# Altium PCB main_board.PcbDoc
Units mil, origin at the board's own origin, x right, y up, seen from the top; angles counter-clockwise.
Board outline 4625.98 x 5708.66 mil, 8 copper layers (layer 01, GND, layer 02, esp32-1, esp32, layer 03, GND-1, layer 04), stack 40.468 mil thick; 45 components, 47 nets, 193 pads, 101 vias.
Unrouted connection lines stored in the file: 1.
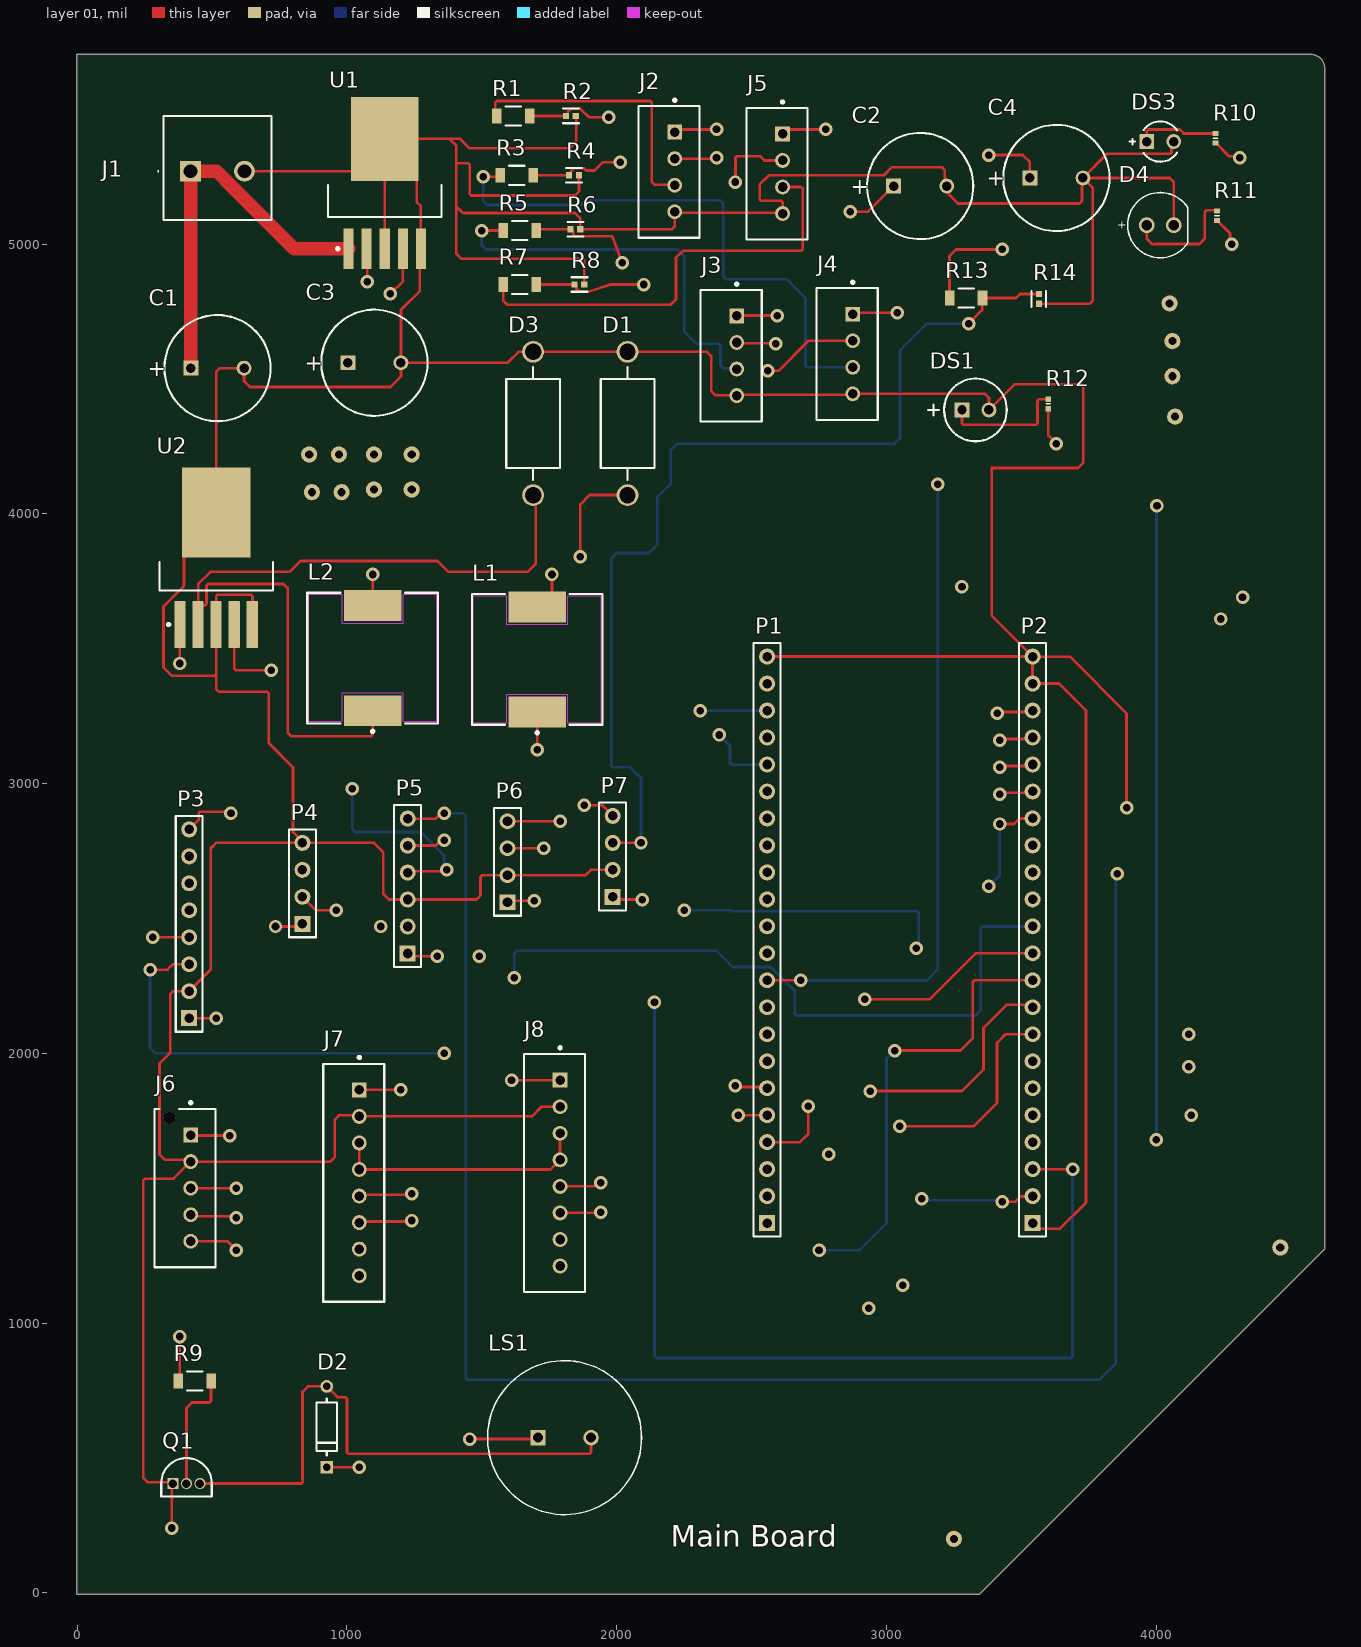
[diagram p0: layer 01 view]
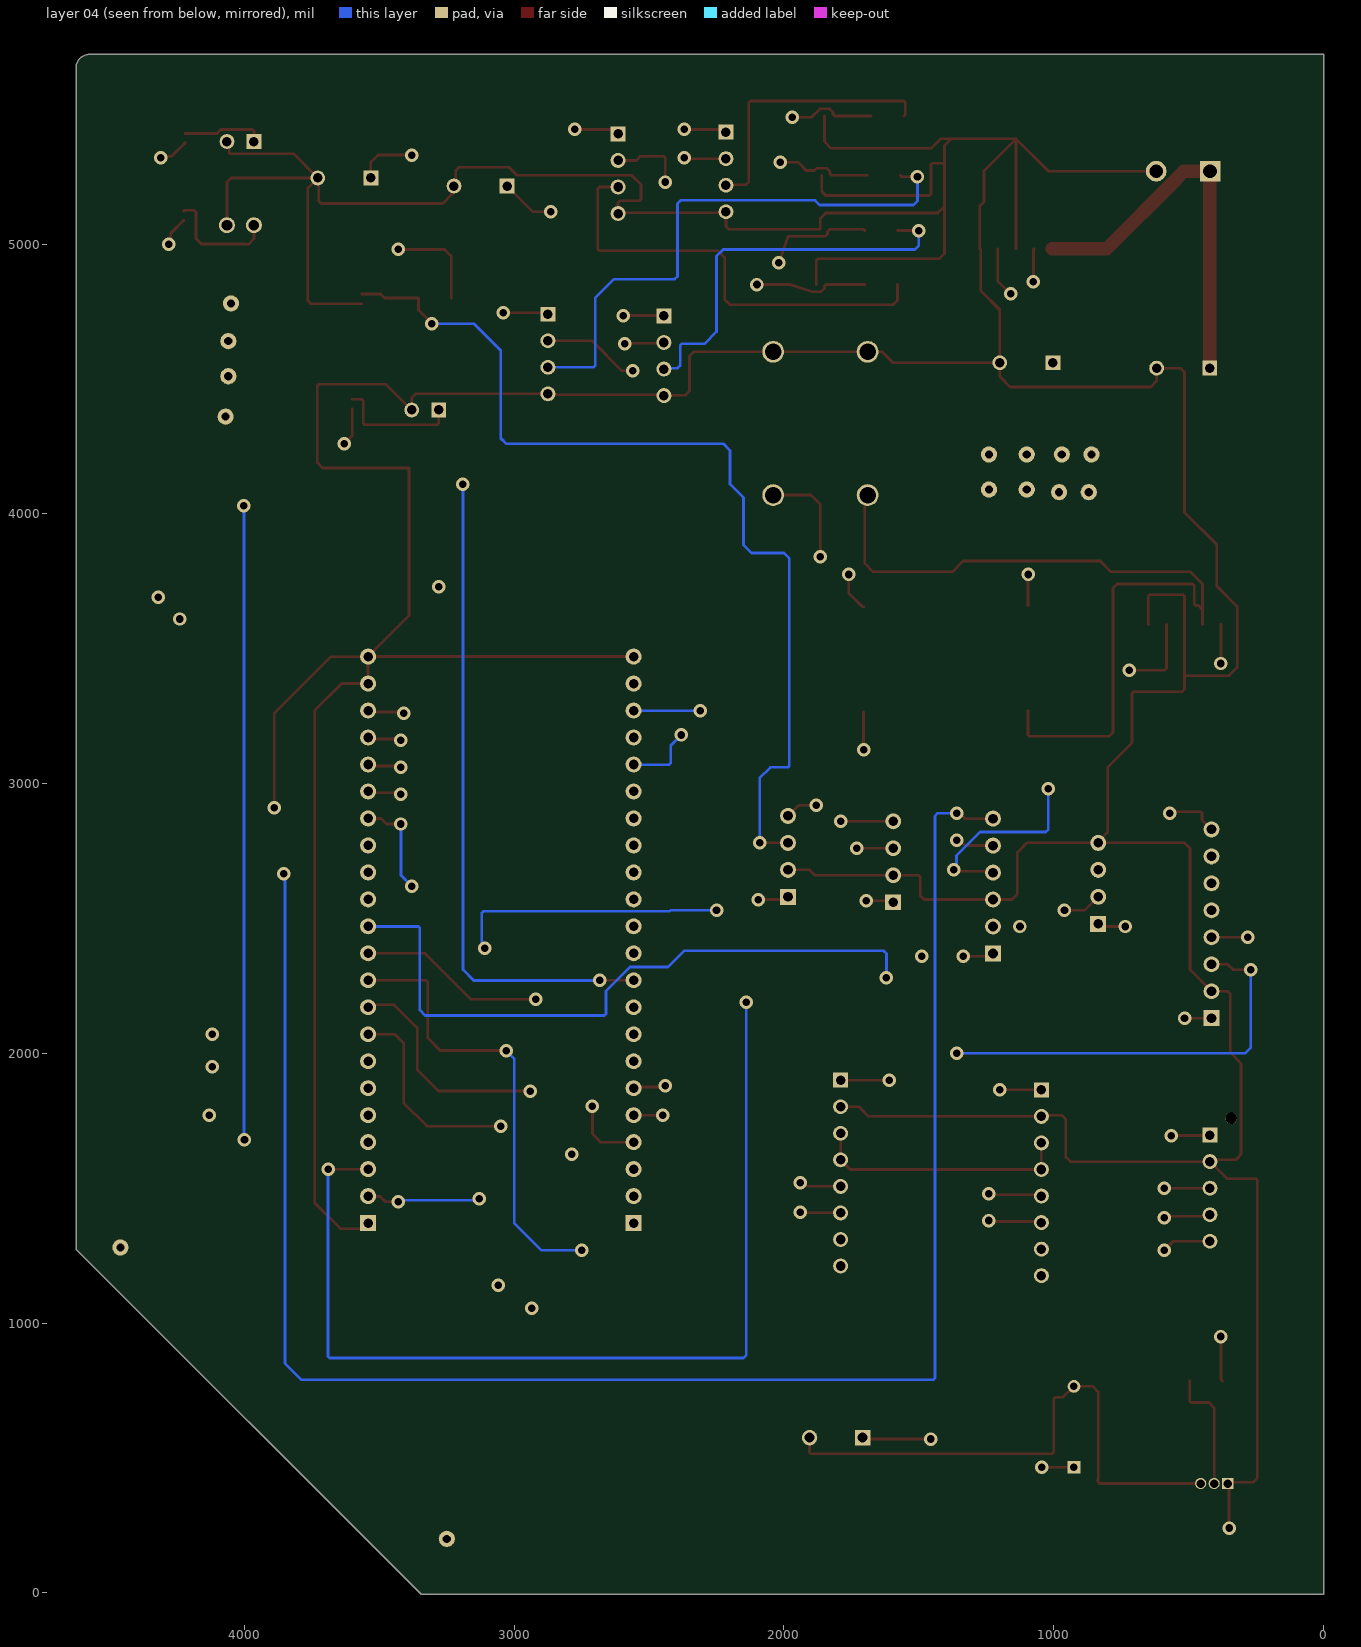
[diagram p1: layer 04 view, seen from below]
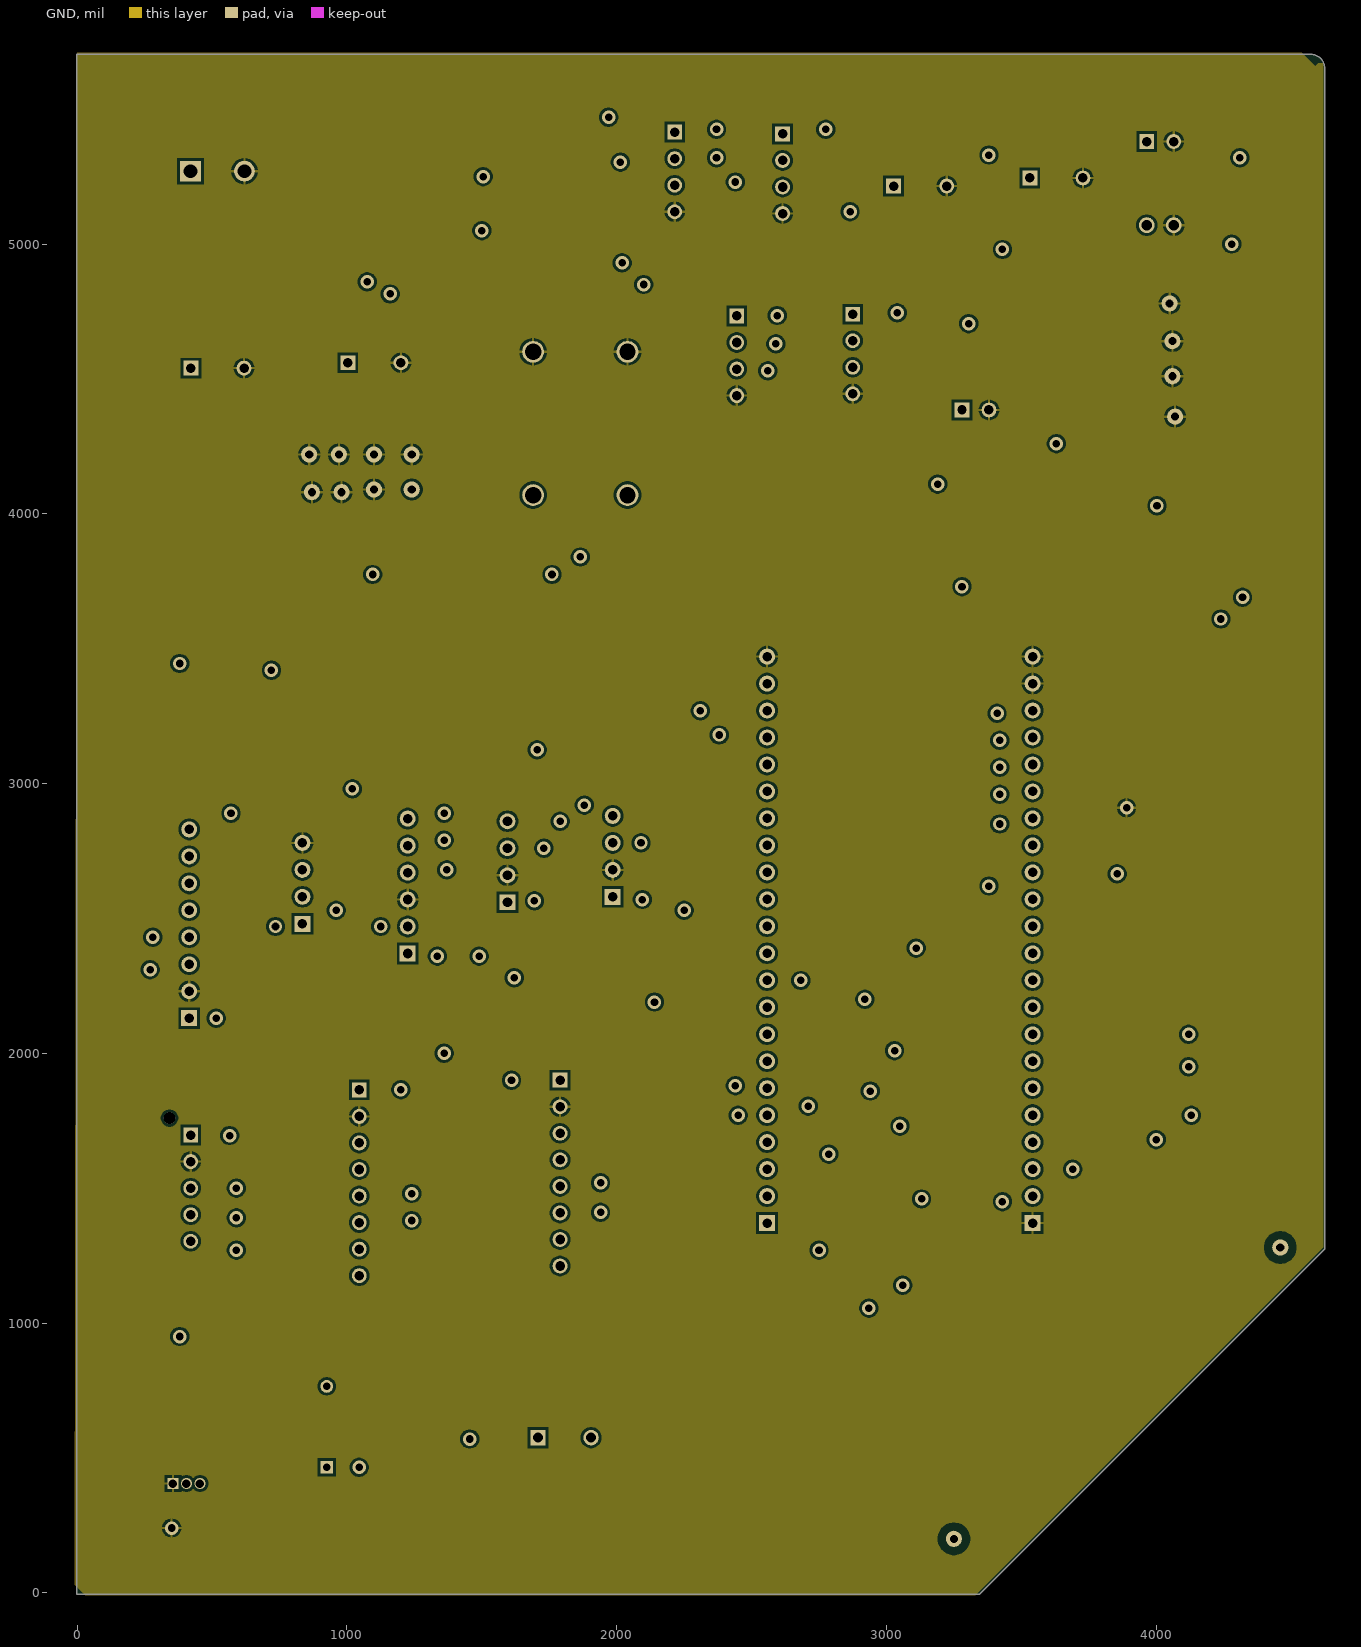
[diagram p2: GND]
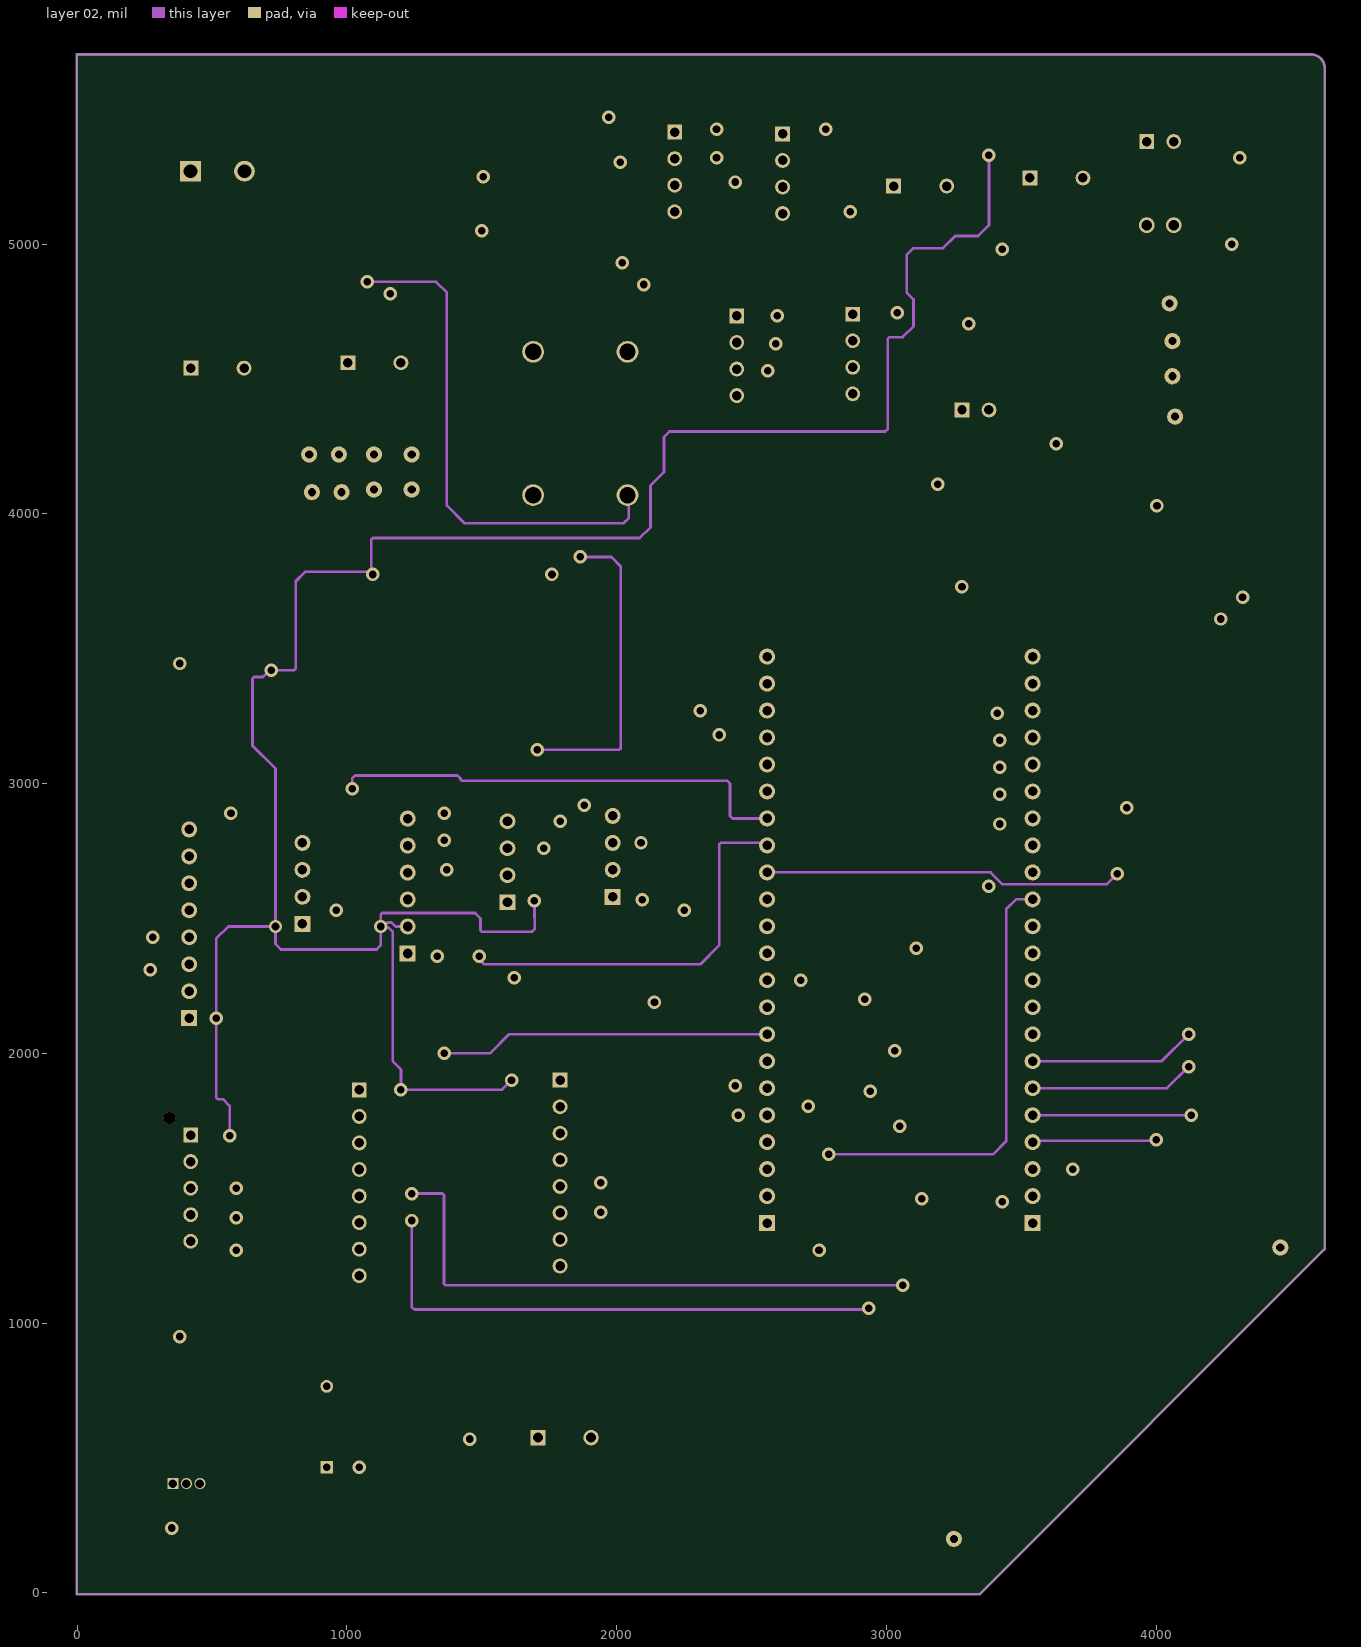
[diagram p3: layer 02]
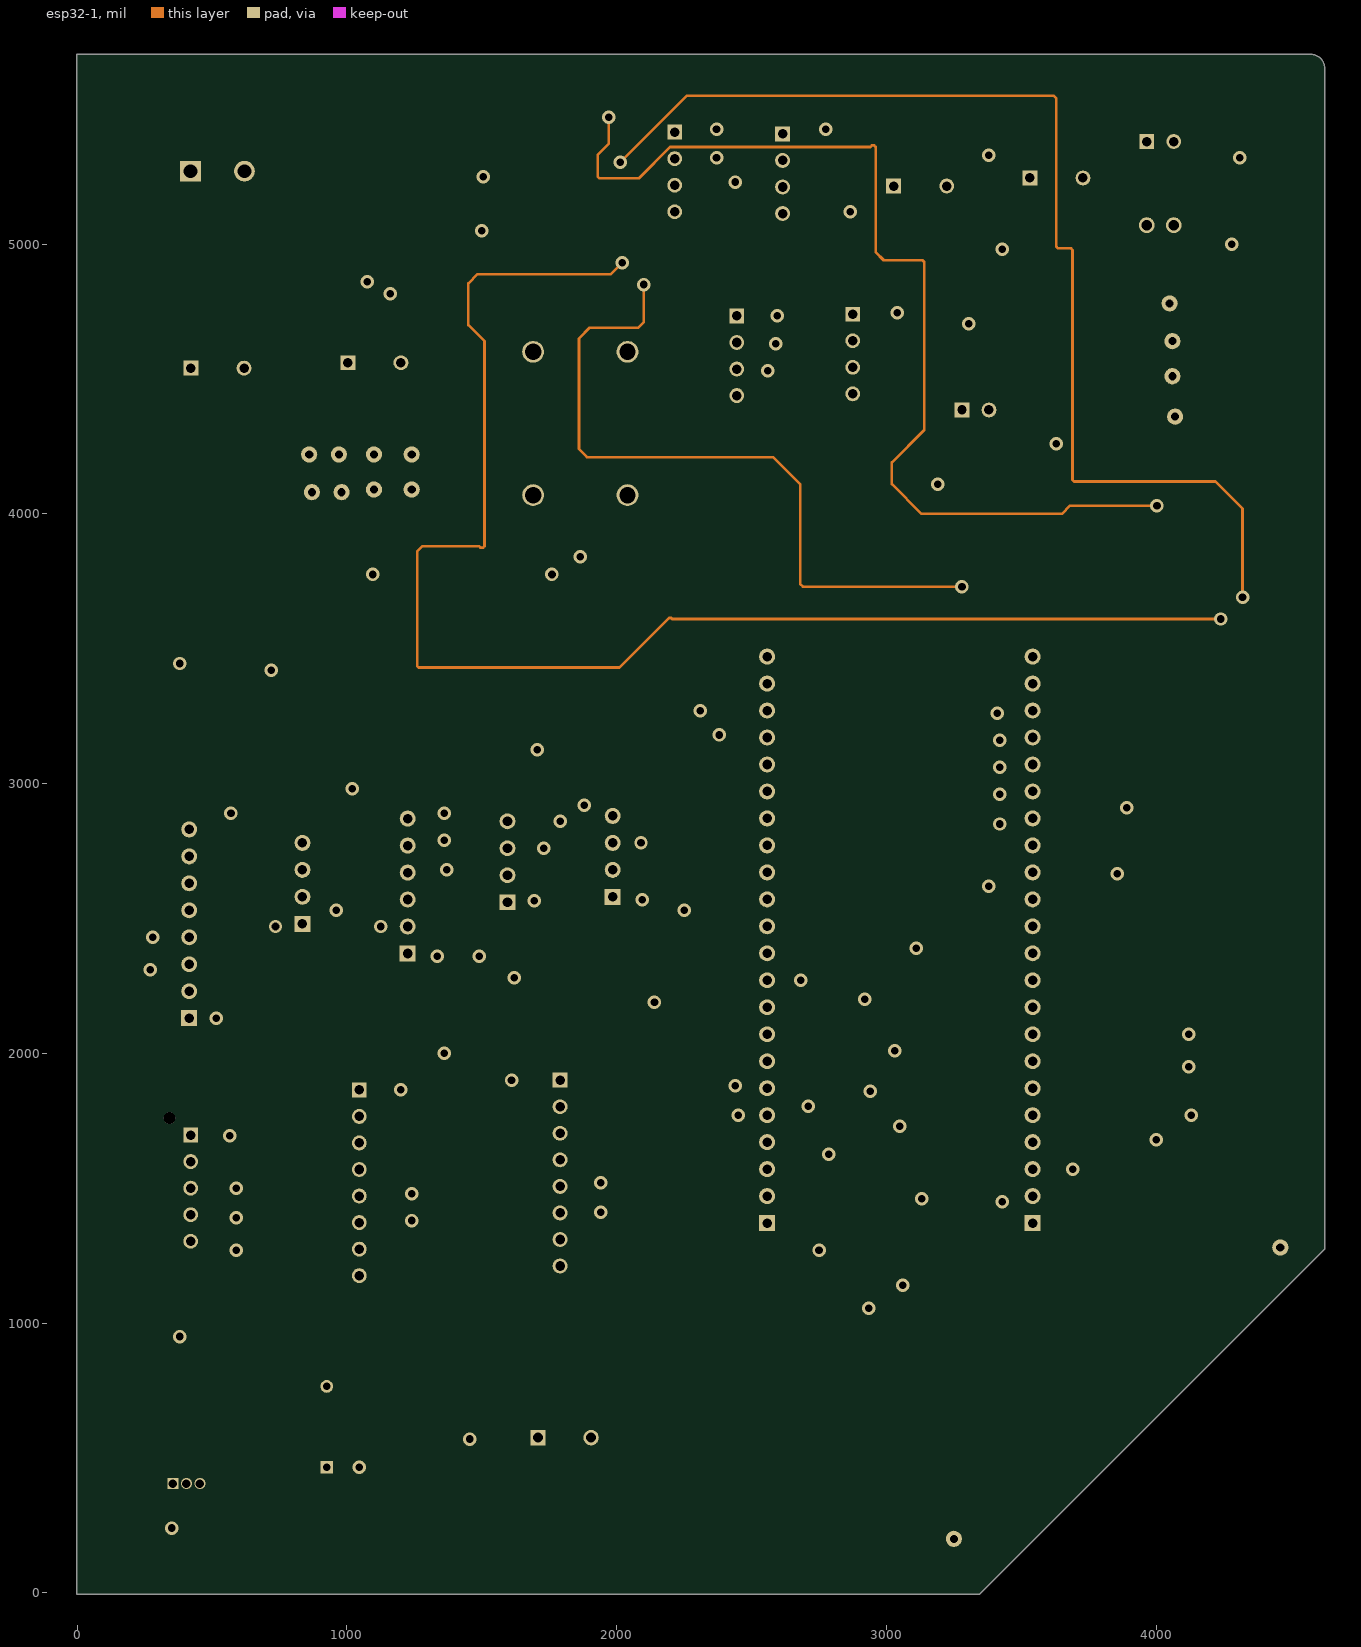
[diagram p4: esp32-1]
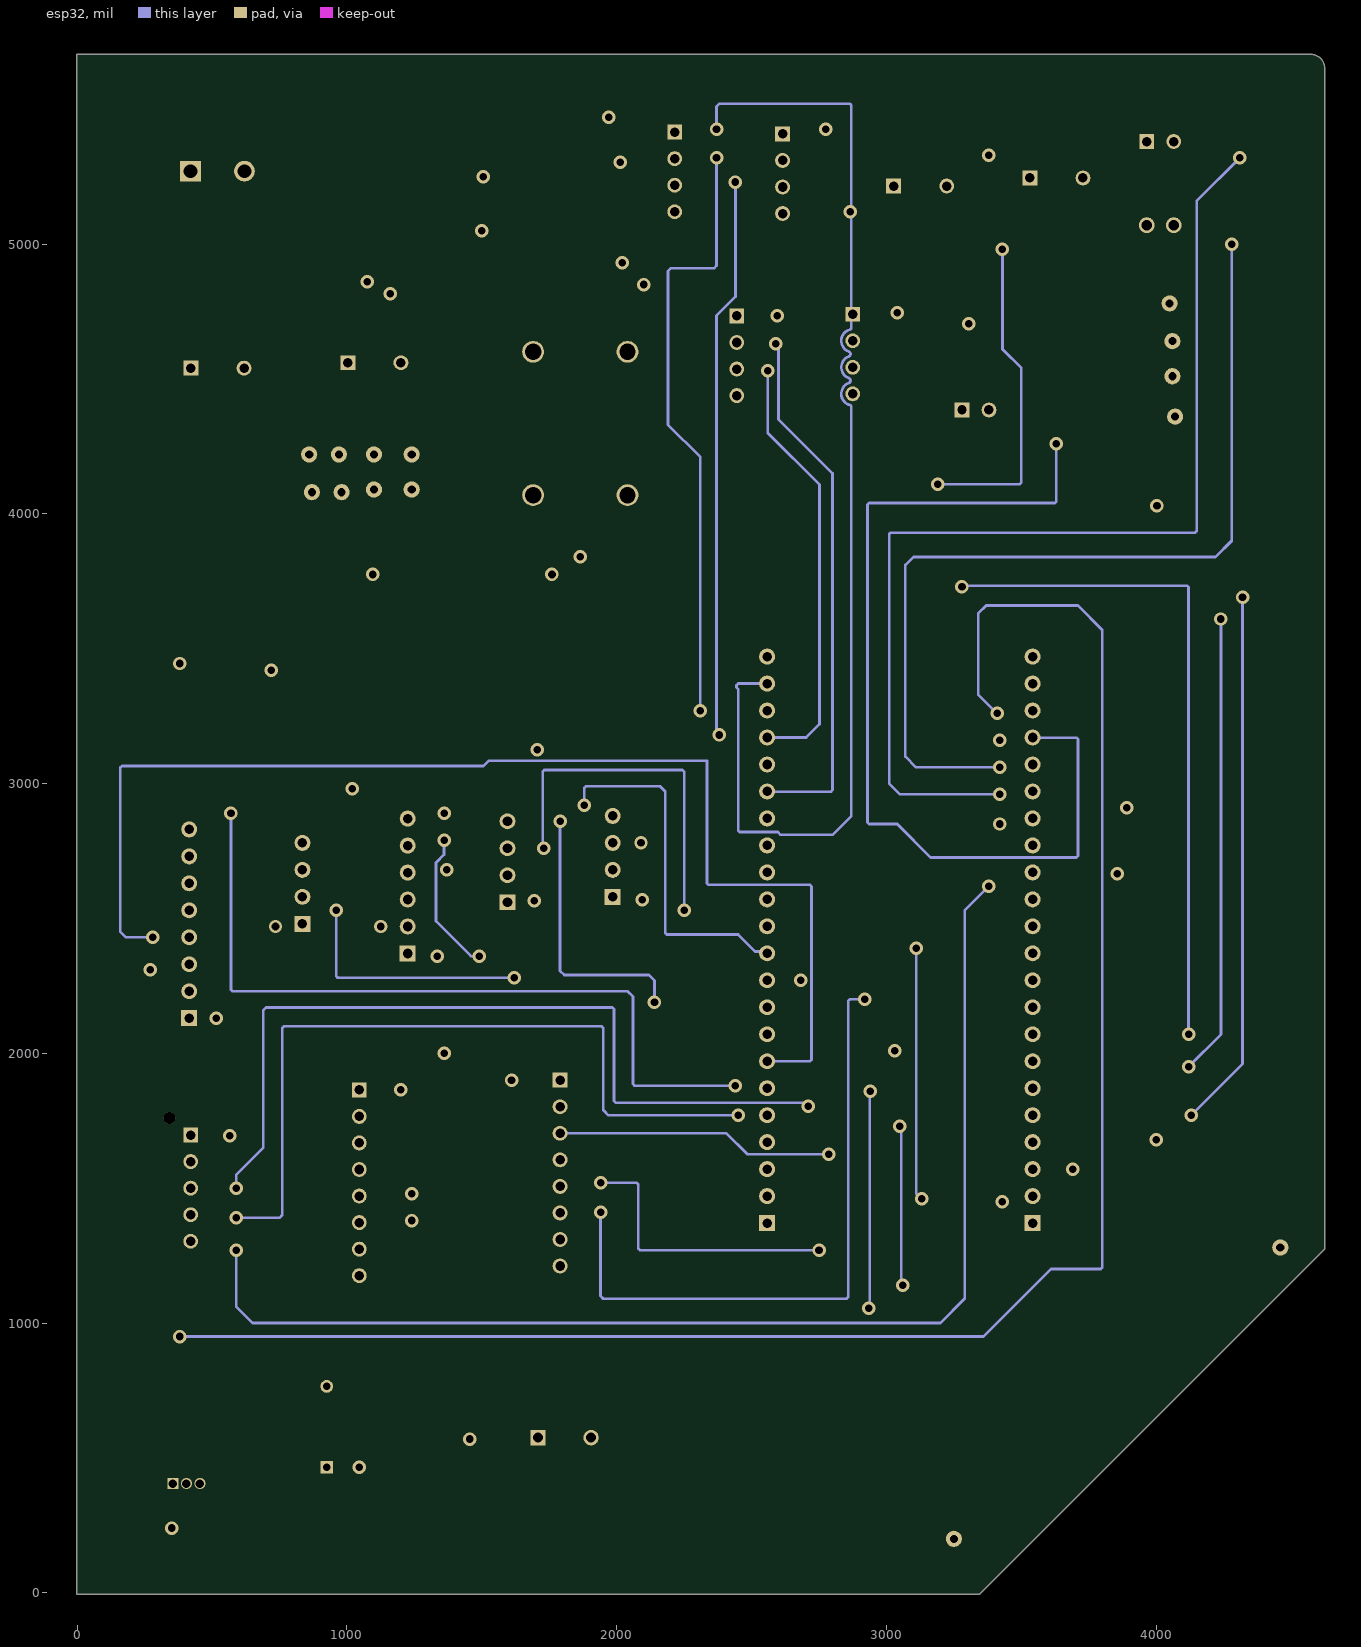
[diagram p5: esp32]
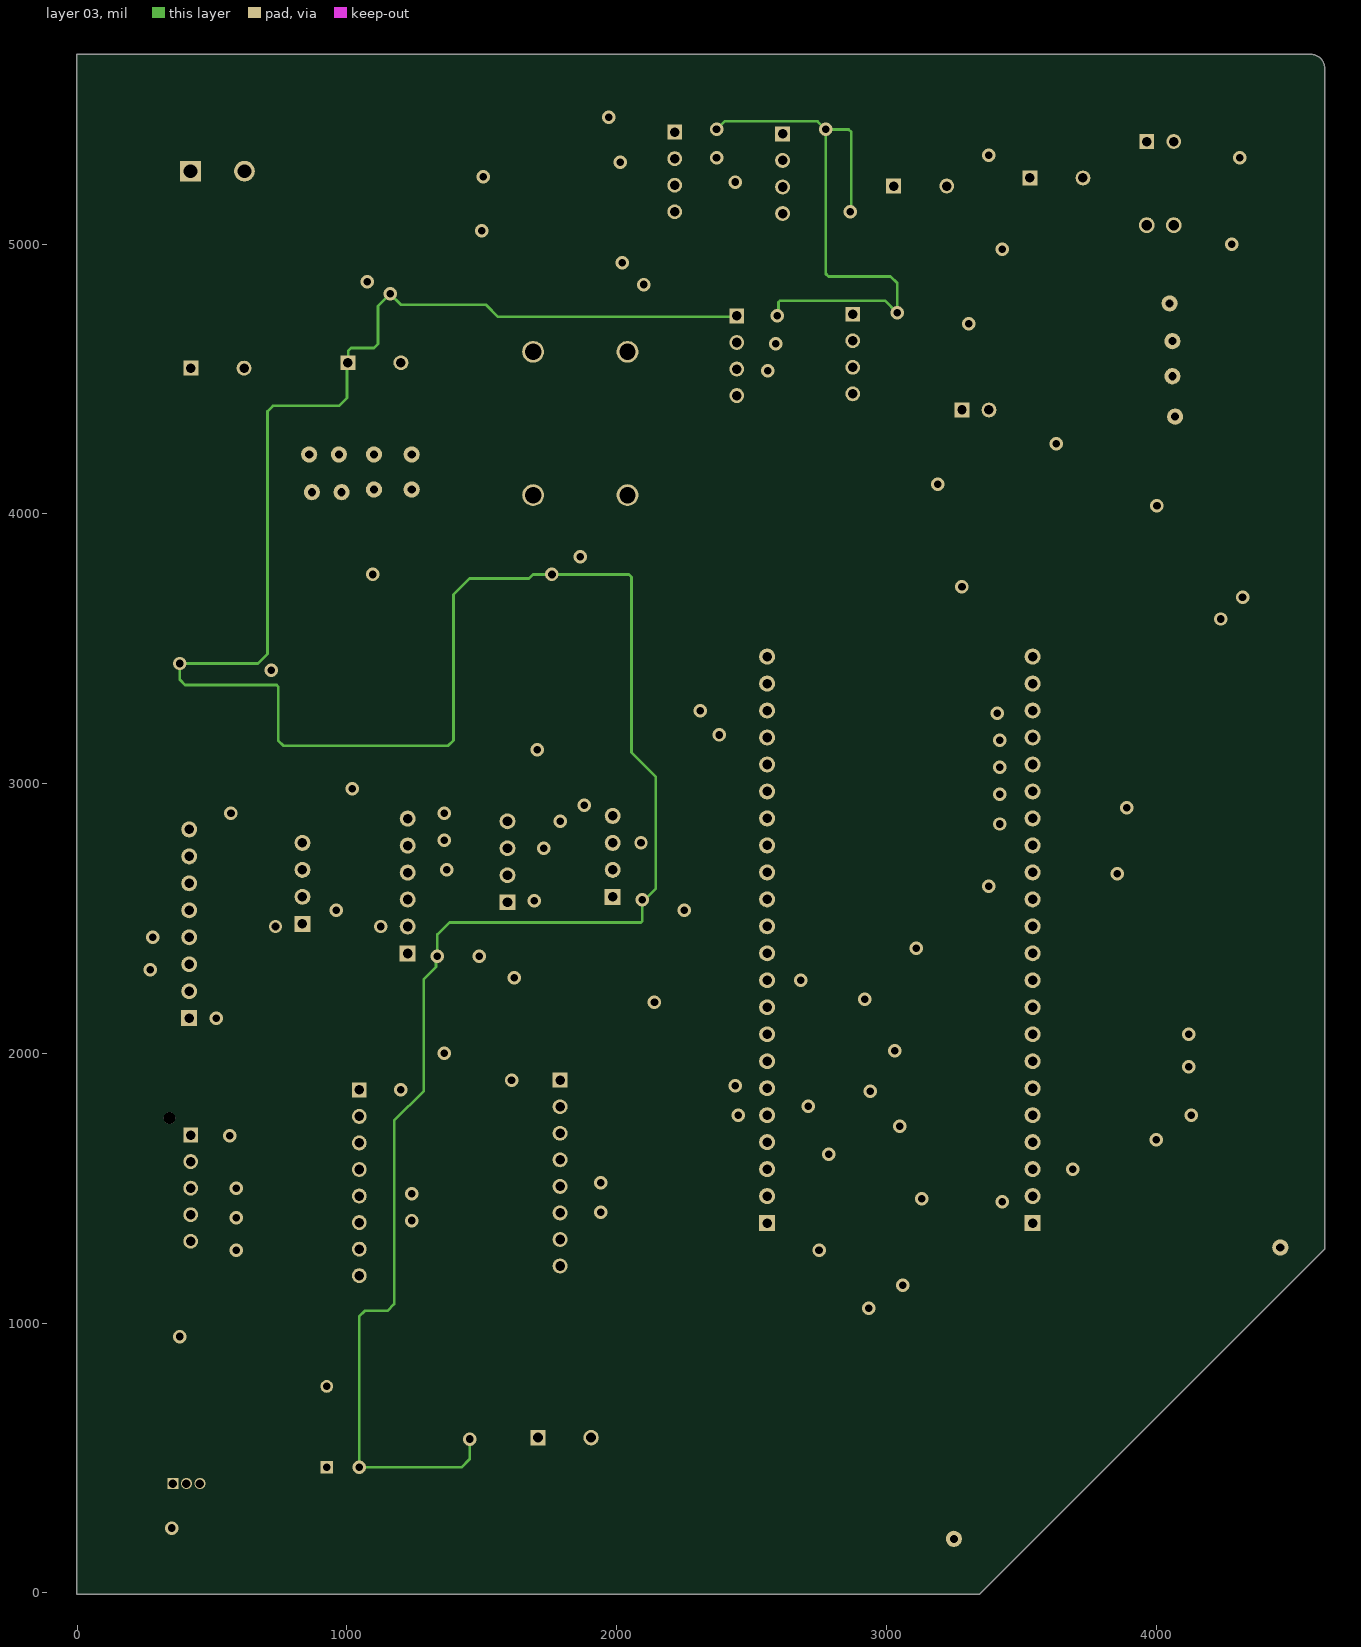
[diagram p6: layer 03]
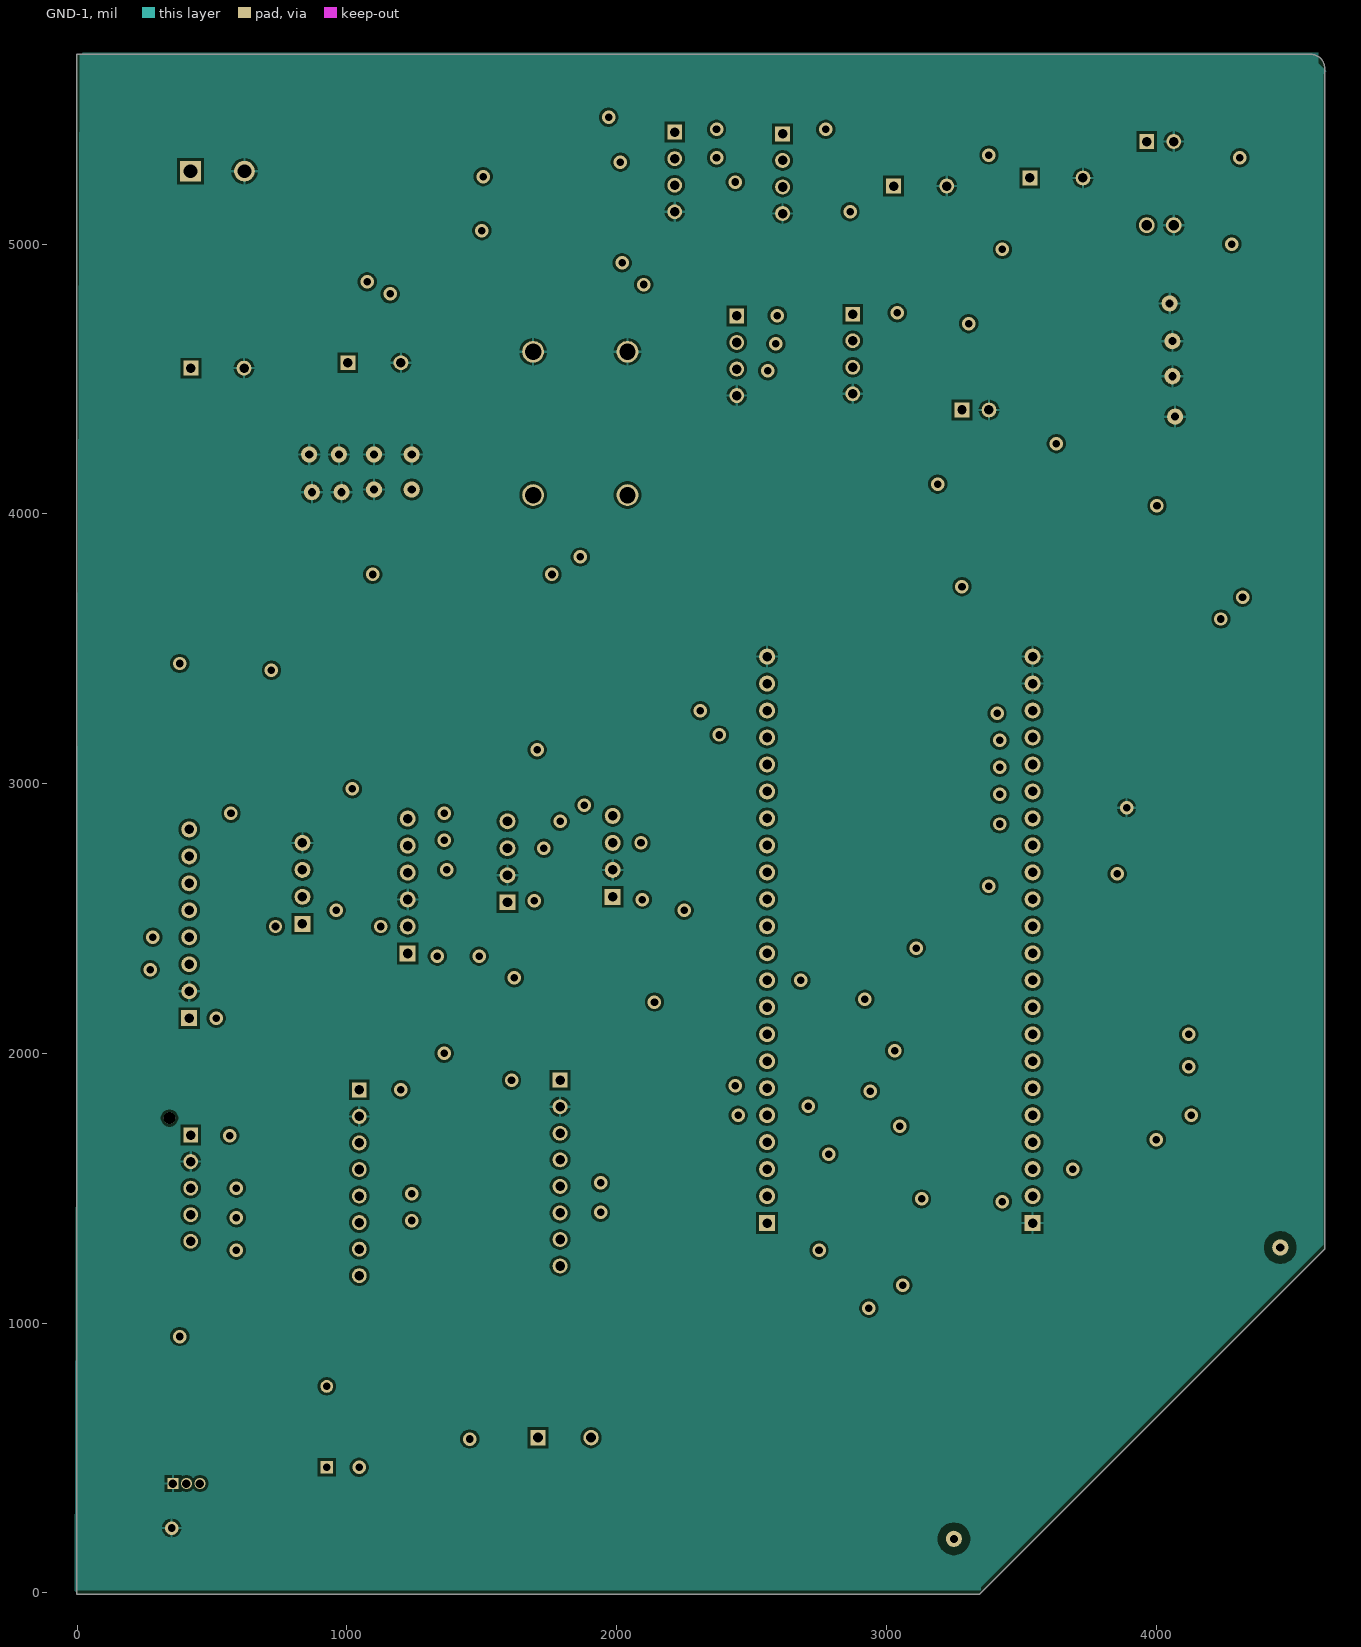
[diagram p7: GND-1]
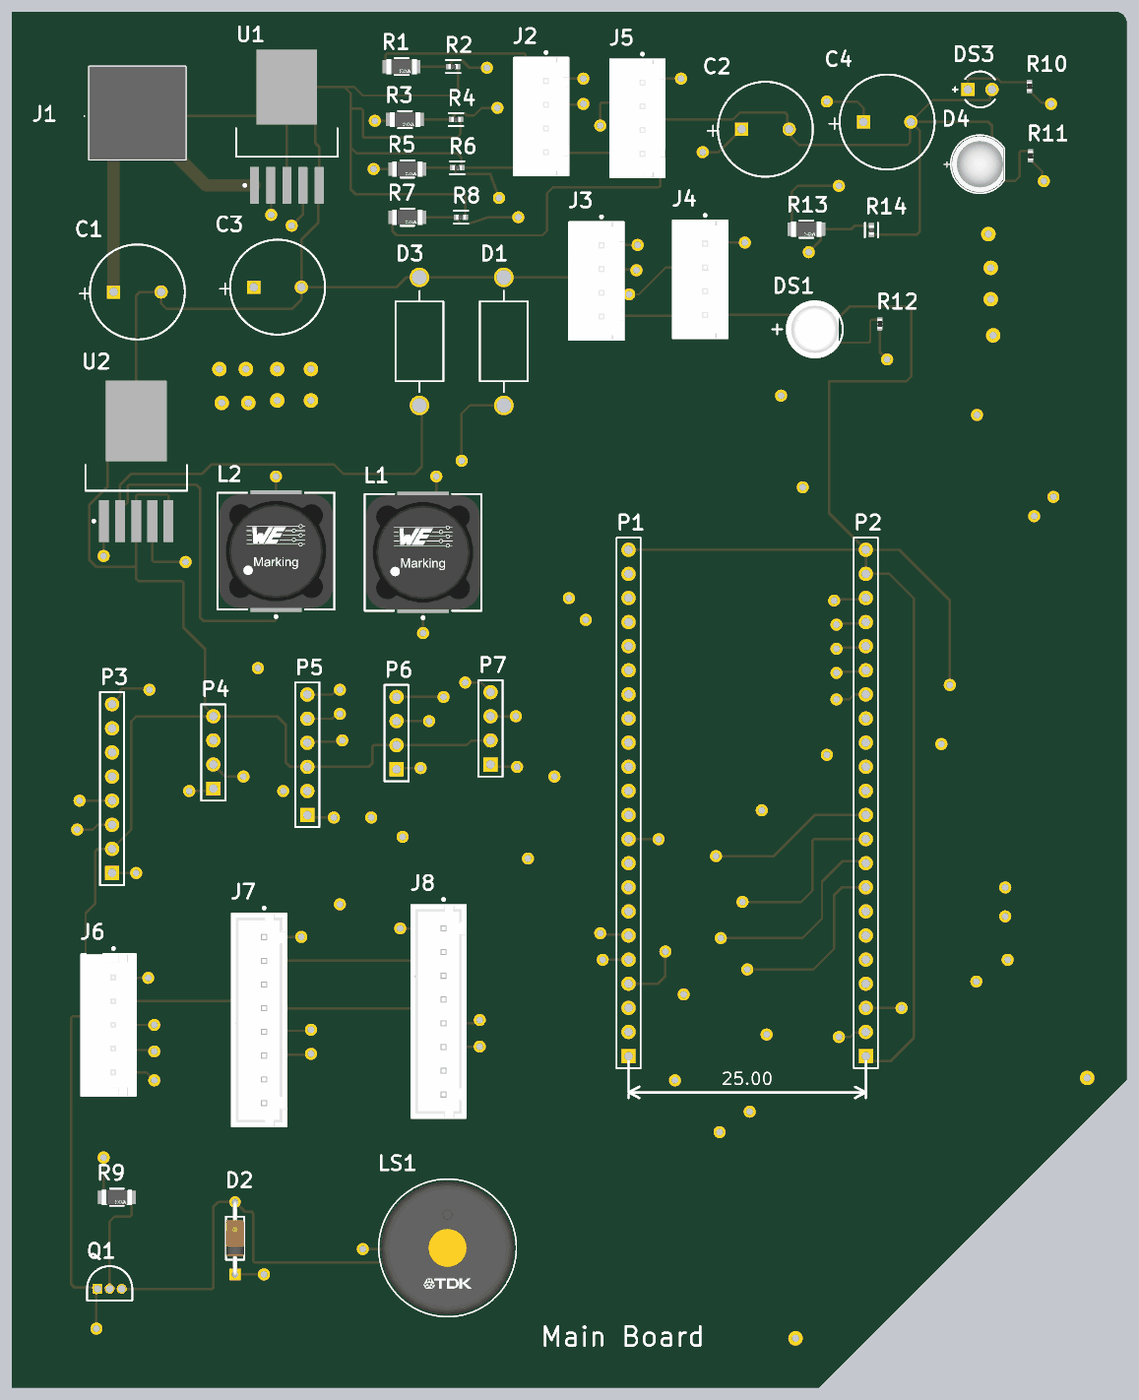
[diagram p8: 3D render of the assembled board from above, using the file's embedded part models]

## Layer stack, top to bottom
Top Solder: solder mask 0.4, Solder Resist, Dk 3.5
layer 01: signal copper 1.378
Dielectric 6: prepreg 2.8, PP-006, Dk 4.1
GND: signal copper 1.378
Dielectric 2: prepreg 2.8, PP-006, Dk 4.1
layer 02: signal copper 1.4
Dielectric 4: prepreg 2.8, PP-006, Dk 4.1
esp32-1: signal copper 1.378
Dielectric 1: dielectric 12.6, FR-4, Dk 4.8
esp32: signal copper 1.378
Dielectric 5: prepreg 2.8, PP-006, Dk 4.1
layer 03: signal copper 1.4
Dielectric 3: prepreg 2.8, PP-006, Dk 4.1
GND-1: signal copper 1.378
Dielectric 7: prepreg 2.8, PP-006, Dk 4.1
layer 04: signal copper 1.378
Bottom Solder: solder mask 0.4, Solder Resist, Dk 3.5

## Board outline
-1.57,-5.75 3344.88,-5.75 4624.41,1273.78 4624.41,5652.91 ccw(c4574.41,5652.91) 4574.41,5702.91 -1.57,5702.91

## Design rules (kind name [scope] priority, off if disabled: settings)
Clearance [All] p1: gap=7.5 ignorepadtopadclearanceinfootprint=FALSE
PolygonConnect [All] p1: connectstyle=Relief reliefconductorwidth=10 reliefentries=4 polygonreliefangle="90 Angle" airgapwidth=10
RoutingVias [All] p1: holewidth=28 width=50 viastyle="Through Hole" minholewidth=28 minwidth=50 maxholewidth=28 maxwidth=50
SolderMaskExpansion [All] p1: expansion=0 istentingtop=FALSE
SupplyNets "Schematic Supply Nets_1" [InNet('GND_NET')] p1: voltage=0.000
SupplyNets "Schematic Supply Nets" [InNet('12V_NET')] p2: voltage=0.000
Width Width_1 [InNet('12V_NET')] p1: maxlimit=50 minlimit=10 preferedwidth=50
Width Width_2 [All] p2: maxlimit=10 minlimit=5 preferedwidth=7.5
30 further rules are at their usual default settings.

## Components (designator, comment, footprint, x,y, rotation, side; value= is the part's Value field where it differs from the comment)
C1 "ECA-1HM471" CAPPR65-500-2000X1000X2200 520,4540 r0 top value=470µF
C2 "ECA-1HM471" CAPPR65-500-2000X1000X2200 3125,5215 r0 top value=220µF
C3 "ECA-1HM471" CAPPR65-500-2000X1000X2200 1101.57,4560 r0 top value=470µF
C4 "ECA-1HM471" CAPPR65-500-2000X1000X2200 3630,5245 r0 top value=220µF
D1 "1N5822G" ONSC-AXIAL_LEAD-2-267-05_V 2040,4335 r90 top
D2 "1N4148" FP-017AG-MFG 925,615 r90 top
D3 "1N5822G" ONSC-AXIAL_LEAD-2-267-05_V 1690,4335 r90 top
D4 "151051BS04000" WL-TMRC_D5.9H8.7 4015,5070 r0 top
DS1 "WP7113SGD" KING-WP7113SGD_V 3330,4385 r0 top
DS3 "LTL-1CHE" INDPR60-254-520X380X650 4015,5380 r0 top
J1 "MKDS_1,5__2-5,08_BK" MKDS152508BK 420,5270 r0 top
J2 "B4B-XH-A(LF)(SN)" FP-B4B-XH-A_LF_SN-MFG 2194.33,5267.36 r90 top
J3 "B4B-XH-A(LF)(SN)" FP-B4B-XH-A_LF_SN-MFG 2424.33,4585.79 r90 top
J4 "B4B-XH-A(LF)(SN)" FP-B4B-XH-A_LF_SN-MFG 2854.33,4592.36 r90 top
J5 "B4B-XH-A(LF)(SN)" FP-B4B-XH-A_LF_SN-MFG 2594.33,5260.79 r90 top
J6 "B5B-XH-AM(LF)(SN)" FP-B5B-XH-AM_LF_SN-MFG 400,1500 r90 top
J7 "B8B-XH-A(LF)(SN)" FP-B8B-XH-A_LF_SN-MFG 1025,1520 r90 top
J8 "B8B-XH-A(LF)(SN)" FP-B8B-XH-A_LF_SN-MFG 1769.33,1555.79 r90 top
L1 "744770133" WE-PD_1280 1705,3460 r0 top
L2 "744770133" WE-PD_1280 1095,3465 r0 top
LS1 "PS1440P02BT" FP-PS1440P02BT-MFG 1806.57,575 r0 top
P1 "Header 22" HDR1X22 2557.48,1370.63 r90 top
P2 "Header 22" HDR1X22 3541.73,1370.63 r90 top
P3 "Header 8" HDR1X8 415,2130 r90 top
P4 "Header 4" HDR1X4 835,2480 r90 top
P5 "Header 6" HDR1X6 1225,2370 r90 top
P6 "Header 4" HDR1X4 1595,2560 r90 top
P7 "Header 4" HDR1X4 1985,2580 r90 top
Q1 "2N3904BU" FAIR-TO-92 355,405 r0 top
R1 "RN73R2BTTD1001F25" FP-RN73R2B-MFG 1616.02,5475 r0 top
R2 "RN73R1ETTP2001F25" FP-RN73R1E-IPC_B 1830,5475 r0 top
R3 "RN73R2BTTD1001F25" FP-RN73R2B-MFG 1630,5255 r0 top
R4 "RN73R1ETTP2001F25" FP-RN73R1E-IPC_B 1841.73,5255 r0 top
R5 "RN73R2BTTD1001F25" FP-RN73R2B-MFG 1640,5050 r0 top
R6 "RN73R1ETTP2001F25" FP-RN73R1E-IPC_B 1846.73,5055 r0 top
R7 "RN73R2BTTD1001F25" FP-RN73R2B-MFG 1640,4850 r0 top
R8 "RN73R1ETTP2001F25" FP-RN73R1E-IPC_B 1861.73,4850 r0 top
R9 "RN73R2BTTD1001F25" FP-RN73R2B-MFG 435,785 r0 top
R10 "Resistor 330R +/-5 % 0402 63 mW" RESC0402(1005)_L 4220,5392.28 r90 top value=330
R11 "Resistor 330R +/-5 % 0402 63 mW" RESC0402(1005)_L 4225,5105 r90 top value=330
R12 "Resistor 330R +/-5 % 0402 63 mW" RESC0402(1005)_L 3600,4407.28 r90 top value=330
R13 "RN73R2BTTD1001F25" FP-RN73R2B-MFG 3295,4800 r0 top
R14 "RN73R1ETTP2001F25" FP-RN73R1E-IPC_B 3565,4796.73 r90 top
U1 "LM2596S-5.0" KTT0005B_L 1140,5226.61 r90 top
U2 "LM2596S-3.3/NOPB" KTT0005B_M 515,3837.68 r90 top

## Footprints (in the part's own frame and the unit in brackets; to place one, negate y for a bottom-side part, rotate by r counter-clockwise, add the part's x,y. Pads: shape width x height; smd on the part's side, far side on the other; paste and mask are expansions set on the pad)
CAPPR65-500-2000X1000X2200 [mm] "THD, 2-Leads, Dia 10mm, Pin Spacing 5mm"
  rect 1.4x1.4 hole 0.9: 1(-2.5,0)
  round 1.4 hole 0.9: 2(2.5,0)
  silkscreen extent -5,-5 5,5, body extent -5,-5 4.95,5, height 22
FAIR-TO-92 [mm] "TO, 3-Leads, Body Dia 4.79mm, Pitch 1.27mm"
  rect 1.05x1.05 hole 0.8 mask+0.05: 1(0,0)
  round 1.05 hole 0.8 mask+0.05: 2(1.27,0) 3(2.54,0)
  silkscreen extent -1.11,-1.21 3.65,2.4, body extent -1.11,-1.21 3.65,2.4, height 5.33
FP-017AG-MFG [mm]
  rect 1.2x1.2 hole 0.7 paste-2539.97 mask+0: 1(-3.813,0)
  round 1.2 hole 0.7 paste-2539.97 mask+0: 2(3.813,0)
  silkscreen extent -2.68,-0.95 2.68,0.95, body extent -4.51,-1.05 4.51,1.05, height 0.25
FP-B4B-XH-A_LF_SN-MFG [mm]
  rect 1.4x1.4 hole 0.9 paste-2539.97 mask+0: 1(3.75,-0.525)
  round 1.4 hole 0.9 paste-2539.97 mask+0: 2(1.25,-0.525) 3(-1.25,-0.525) 4(-3.75,-0.525)
  silkscreen extent -6.2,-2.88 6.87,2.88, body extent -6.3,-2.98 6.3,2.98, height 0.25
FP-B5B-XH-AM_LF_SN-MFG [mm]
  rect 1.4x1.4 hole 0.9 paste-2539.97 mask+0: 1(5,-0.525)
  round 1.4 hole 0.9 paste-2539.97 mask+0: 2(2.5,-0.525) 3(0,-0.525) 4(-2.5,-0.525) 5(-5,-0.525)
  round 1.1 hole 1.1 unplated paste-2539.97 mask+0: ""(6.6,1.475)
  silkscreen extent -7.45,-2.88 8.17,2.88, body extent -7.55,-2.98 7.55,2.98, height 0.25
FP-B8B-XH-A_LF_SN-MFG [mm]
  rect 1.4x1.4 hole 0.9 paste-2539.97 mask+0: 1(8.75,-0.525)
  round 1.4 hole 0.9 paste-2539.97 mask+0: 2(6.25,-0.525) 3(3.75,-0.525) 4(1.25,-0.525) 5(-1.25,-0.525) 6(-3.75,-0.525) 7(-6.25,-0.525) 8(-8.75,-0.525)
  silkscreen extent -11.2,-2.88 11.92,2.88, body extent -11.3,-2.98 11.3,2.98, height 0.25
FP-PS1440P02BT-MFG [mm]
  rect 1.45x1.45 hole 0.95 paste-2539.97 mask+0: 1(-2.5,0)
  round 1.45 hole 0.95 paste-2539.97 mask+0: 2(2.5,0)
  silkscreen extent -7.25,-7.25 7.25,7.25, body extent -7.35,-7.35 7.35,7.35, height 0.25
FP-RN73R1E-IPC_B [mil]
  rect 23.14x22.54 smd paste+0 mask+0: 1(-18.27,0) 2(18.27,0)
  silkscreen extent -30,-27 30,27, body extent -36,-17 36,17, height 10
FP-RN73R2B-MFG [mm]
  rect 0.9x1.4 smd paste+0 mask+0: 1(-1.55,0) 2(1.55,0)
  silkscreen extent -0.72,-0.9 0.72,0.9, body extent -2.1,-1 2.1,1, height 0.25
HDR1X4 [mm] "Connector; Header; 4 Position"
  rect 1.5x1.5 hole 0.9: 1(0,0)
  round 1.5 hole 0.9: 2(2.54,0) 3(5.08,0) 4(7.62,0)
  silkscreen extent -1.27,-1.27 8.89,1.27
HDR1X6 [mm] "Connector; Header; 6 Position"
  rect 1.5x1.5 hole 0.9: 1(0,0)
  round 1.5 hole 0.9: 2(2.54,0) 3(5.08,0) 4(7.62,0) 5(10.16,0) 6(12.7,0)
  silkscreen extent -1.27,-1.27 13.97,1.27
HDR1X8 [mm] "Connector; Header; 8 Position"
  rect 1.5x1.5 hole 0.9: 1(0,0)
  round 1.5 hole 0.9: 2(2.54,0) 3(5.08,0) 4(7.62,0) 5(10.16,0) 6(12.7,0) 7(15.24,0) 8(17.78,0)
  silkscreen extent -1.27,-1.27 19.05,1.27
HDR1X22 [mm] "Connector; Header; 22 Position"
  rect 1.5x1.5 hole 0.9: 1(0,0)
  round 1.5 hole 0.9: 2(2.54,0) 3(5.08,0) 4(7.62,0) 5(10.16,0) 6(12.7,0) 7(15.24,0) 8(17.78,0) 9(20.32,0) 10(22.86,0) 11(25.4,0) 12(27.94,0) 13(30.48,0) 14(33.02,0) 15(35.56,0) 16(38.1,0) 17(40.64,0) 18(43.18,0) 19(45.72,0) 20(48.26,0) 21(50.8,0) 22(53.34,0)
  silkscreen extent -1.27,-1.27 54.61,1.27
INDPR60-254-520X380X650 [mm] "THD, 2-Leads, Dia 3.8mm, Pitch 2.54mm"
  rect 1.4x1.4 hole 0.9: 1(-1.27,0)
  round 1.4 hole 0.9: 2(1.27,0)
  silkscreen extent -2.87,-1.9 1.58,1.9, body extent -1.9,-1.9 1.9,1.9, height 6.5
KING-WP7113SGD_V [mm] "THD, 2-Leads, Dia 5.9mm, Body Length 8.6mm"
  rect 1.4x1.4 hole 0.889: 1(-1.27,0)
  round 1.4 hole 0.889: 2(1.27,0)
  silkscreen extent -4.47,-2.95 2.95,2.95, body extent -2.95,-2.95 2.5,2.95, height 15.5
KTT0005B_L [mm] "DPAK, 5-Leads, Body 10.65x9.65mm, Pitch 1.7mm, IPC High Density"
  rrect11% 3.85x0.95 smd: 1(-6.2,3.4) 2(-6.2,1.7) 3(-6.2,0) 4(-6.2,-1.7) 5(-6.2,-3.4)
  rrect2% 7.9x6.4 smd: 6(4.15,0)
  silkscreen extent -6.32,-5.35 -0.2,5.35, body extent -3.2,-5.32 6.45,5.33, height 4.83
KTT0005B_M [mm] "DPAK, 5-Leads, Body 10.65x9.65mm, Pitch 1.7mm, IPC Low Density"
  rrect10% 4.45x1.05 smd: 1(-6.3,3.4) 2(-6.3,1.7) 3(-6.3,0) 4(-6.3,-1.7) 5(-6.3,-3.4)
  rrect2% 8.5x6.45 smd: 6(4.25,0)
  silkscreen extent -6.42,-5.35 -0.4,5.35, body extent -3.1,-5.32 6.55,5.33, height 4.83
MKDS152508BK [mm]
  rect 1.95x1.95 hole 1.3: 1(0,0)
  round 1.95 hole 1.3: 2(5.08,0)
  silkscreen extent -3.1,-4.6 7.62,5.2, body extent -2.54,-4.6 7.62,5.2, height 14.05
ONSC-AXIAL_LEAD-2-267-05_V [mm] "AXIAL, 2-Leads, Diameter 5.05mm"
  round 2.05 hole 1.55: 1(-6.745,0) 2(6.745,0)
  silkscreen extent -5.32,-2.52 5.32,2.52
RESC0402(1005)_L [mm] "Chip Resistor, Body 1.0x0.5mm, IPC High Density"
  rrect25% 0.5x0.55 smd: 1(-0.45,0) 2(0.45,0)
  silkscreen extent 0,-0.2 0,0.2, body extent -0.5,-0.25 0.5,0.25, height 0.3
WE-PD_1280 [mm] "SMT Shielded Power Inductor, 2-leads, body 12x12mm"
  rect 5.4x2.9 smd: 1(0,-4.95) 2(0,4.95)
  layer 01 keep-out region: -6,6 -2.9,6 -2.9,3.3 2.9,3.3 2.9,6 6,6 6,-6 2.9,-6 2.9,-3.3 -2.9,-3.3 -2.9,-6 -6,-6
  silkscreen extent -6.15,-7.02 6.15,6.15, body extent -6,-6 6,6, height 7.51
WL-TMRC_D5.9H8.7 [mm] "THT Mono-color Round Color LED, 2-leads"
  round 1.5 hole 1: 1(-1.27,0) 2(1.27,0)
  silkscreen extent -3.07,-3.07 2.58,3.08, body extent -2.95,-2.95 2.45,2.95, height 9.2

## Part data
C1 C2 C3 C4: library part CMP-001-00032-8, "Aluminum Electrolytic Capacitor, 470 uF, +/- 20%, 50 V, -40 to 85 degC, 2-Pin THD, RoHS, Bulk", Capacitor Type=Electrolytic, Case/Package=Radial, Manufacturer=Panasonic, Max Operating Temperature=85°C, Min Operating Temperature=-40°C, Package Description="2-Pin Radial Lead, Dia 10 mm, Height 22 mm", Package Quantity=200, Package Reference=CAPPR65-500-2000X1000X2200, Ripple Current=650mA, Tolerance=20%, Voltage Rating=50V, Datasheet URL=http://industrial.panasonic.com/cdbs/www-data/pdf/RDF0000/ABA0000C1047.pdf, Datasheet Version=Mar-16, Diameter=10mm, Lead Pitch=5mm, Manufacturer URL=http://www.panasonic.com/, Mounting Technology=TH, Packaging=Bulk, Pins=2, Ripple Current (AC)=650mA, RoHS Compliant=True
D1 D3: library part CMP-1055-00009-1, "Rectifier, 2-Pin Axial_Lead, Pb-Free, Bulk Bag", Manufacturer="On Semiconductor", ComponentLink1Description="Manufacturer URL", ComponentLink1URL=http://www.onsemi.com/, ComponentLink2Description=Datasheet, ComponentLink2URL=http://www.onsemi.cn/pub_link/Collateral/1N5820-D.PDF, ComponentLink3Description="Package Specification", ComponentLink3URL=http://www.onsemi.com/pub_link/Collateral/267-05.PDF, Configuration=Single, DatasheetVersion="Rev. 10", IFSM Max (A)=80, Mounting Technology="Through Hole", PackageDescription="2-Pin, Axial Lead, Diameter 5.05 mm", PackageReference=AXIAL_LEAD-2-267-05, PackageVersion="Rev. G, 06/2000", Packing="Bulk Bag", PartNumber=1N5822G, RoHS=TRUE
D2: library part CMP-07163-000046-1, "DIODE GEN PURP 100V 200MA DO35", Average Rectified Current=200mA, Capacitance=4pF, Case/Package=DO-35, Current=4A, Forward Current=300mA, Forward Voltage=1V, Max Forward Surge Current (Ifsm)=1A, Max Operating Temperature=175°C, Max Power Dissipation=500mW, Max Repetitive Reverse Voltage (Vrrm)=100V, Max Reverse Current=5uA, Min Operating Temperature=-65°C, Package Quantity=2000, Contact Plating=Tin, Current Rating=200mA, Diameter=1.91mm, Element Configuration=Single, Height=4.56mm, Lead Free="Lead Free", Length=4.56mm, Max Reverse Voltage (DC)=100V, Max Surge Current=4A, Mount="Through Hole", Number of Pins=2, Output Current=200mA, Outside Diameter=1.85mm, Packaging=Bulk, Peak Non-Repetitive Surge Current=4A, Polarity=Standard, Power Dissipation=500mW, Radiation Hardening=No, REACH SVHC="No SVHC", Recovery Time=4ns, Reverse Recovery Time=4ns, Reverse Voltage=100V, Series=-, Voltage=100V, Voltage Rating (DC)=100V, Weight=0.01lb, Width=1.91mm
D4: library part CMP-1488-00009-3, "Single Color LED, Blue, Diffused, T-1 3/4, 4.9mm", Case/Package=Radial, Color=Blue, Forward Current=100mA, Forward Voltage=3.2V, Manufacturer Lifecycle Status=ACTIVE, Max Operating Temperature=85°C, Max Reverse Voltage (DC)=5V, Min Operating Temperature=-40°C, Test Current=20mA, Dominant Wavelength=470nm, Height=8.6mm, Length=5mm, Lens Size=5mm, Lens Style="Circular, Diffused, Round", Lifecycle Status=Production, Luminous Intensity=500mcd, Mount="Through Hole", Packaging=Bulk, Peak Wavelength=465nm, REACH SVHC=Unknown, RoHS=Compliant, Viewing Angle=40°, Wavelength=470nm, Width=5mm, YEOL="1 = Estimated lifetime > 10 years"
DS1: library part CMP-007-00010-2, "LED Green, 62.5 mW, 25 mA, -40 to 85 degC, 2-Pin THD, RoHS, Bulk", Case/Package=Radial, Colour=Green, Forward Voltage=2.2V, Manufacturer=Kingbright, Package Description="2-Pin Through Hole Device, Dia 5.9 mm, Body Length 8.6 mm", Package Quantity=1000, Power=62.5mW, Datasheet URL=http://www.kingbrightusa.com/images/catalog/SPEC/WP7113SGD.pdf, Datasheet Version="Rev. 6B, 01/2015", Illumination Colour=Green, Lens Style=Dome, Luminous Intensity=40mcd, Mounting Technology=TH, Nominal Vf=2.2V, Package Reference=WP7113SGD, Packaging=Bulk, RoHS Compliant=True, Viewing Angle=30degrees
DS3: library part CMP-007-00018-2, "LED Uni-Color Red, 100 mW, 30 mA, -55 to 100 degC, 2-Pin THD, RoHS, Bulk", Case/Package=Radial, Colour=Red, Forward Current=20mA, Forward Voltage=2V, Manufacturer=Lite-On, Max Operating Temperature=100°C, Min Operating Temperature=-55°C, Package Description="2-Pin Through Hole Device, Dia 3.8 mm, Pitch 2.54 mm", Package Quantity=1000, Datasheet URL=https://datasheet.ciiva.com/15117/getdatasheetpartid-187746-15117985.pdf, Datasheet Version=Dec-03, Illumination Colour=Red, Lens Style=Dome, Luminous Intensity=12.6mcd, Manufacturer URL=http://www.us.liteon.com/, Mounting Technology=TH, Nominal Vf=2V, Package Reference=LTL-1CHE, Packaging=Bulk, Pins=2, RoHS Compliant=True, Viewing Angle=60degrees
J1: "Connector", Manufacturer_Name="Phoenix Contact", Manufacturer_Part_Number="MKDS 1,5/ 2-5,08 BK", Datasheet Link=https://pxc-crisp-production-platform-cr-s3downloadbucket-1rf23da6xdlmt.s3.eu-west-1.amazonaws.com/7991510?response-content-disposition=inline%3B%20filename%3D%22pxc_1718760_03_03_MKDS-1-5-2-5-08-BK_FAM.pdf%22&X-Amz-Algorithm=AWS4-HMAC-SHA256&X-Amz-Date=2, Height=13.95mm
J2 J3 J4 J5: library part CMP-17439-000250-1, "CONN HEADER VERT 4POS 2.5MM", Color=Natural, Contact Resistance=20mR, Current Rating=3A, Flammability Rating="UL94 V-0", Housing Color=White, Insulation Resistance=1GR, Max Operating Temperature=85°C, Max Voltage Rating (AC)=250V, Min Operating Temperature=-25°C, Package Quantity=500, Connector Type=Header, Contact Finish - Mating=TIN, Contact Material=Brass, Contact Plating=Tin, Contact Shape=Square, Contact Type="Male Pin", Depth=5.75mm, Fastening Type=Detent, Gender=Male, Housing Material=Polyamide, Insulation Color=Natural, Insulation Material=Nylon, Lead Free="Lead Free", Lead Pitch=2.5mm, Length=12.4mm, Mated Stacking Heights=9.8mm, Material=Polyamide, Max Current Rating=3A, Max Voltage Rating (DC)=250V, Mount="Through Hole", Number of Contacts=4, Number of Positions=4, Number of Rows=1, Orientation=Straight, Packaging=Bulk, Pitch=2.5mm, REACH SVHC="No SVHC", Series=XH, Termination=Solder, Voltage Rating=250V, Voltage Rating (AC)=250V, Wire/Cable Gauge=22AWG
J6: library part CMP-17439-000304-1, "CONN HEADER VERT 5POS 2.5MM", Color=Green, Contact Resistance=20mR, Flammability Rating="UL94 V-0", Housing Color=White, Insulation Color=Natural, Max Current Rating=3A, Max Operating Temperature=85°C, Max Voltage Rating (AC)=250V, Min Operating Temperature=-25°C, Connector Type=Header, Contact Finish - Mating=TIN, Contact Material=Brass, Contact Plating=Copper, Contact Shape=Square, Contact Type="Male Pin", Depth=5.75mm, Fastening Type=Detent, Housing Material=Polyamide, Insulation Material=Nylon, Lead Free="Lead Free", Length=14.9mm, Mated Stacking Heights=9.8mm, Mount="Through Hole", Number of Positions=5, Number of Rows=1, Orientation=Straight, Packaging=Bulk, Pitch=2.5mm, Series=XH, Termination=Solder, Voltage Rating=250V
J7 J8: library part CMP-17438-000015-1, "CONN HEADER VERT 8POS 2.5MM", Color=Natural, Contact Resistance=20mR, Current Rating=3A, Housing Color=White, Insulation Resistance=1GR, Max Operating Temperature=85°C, Max Voltage Rating (AC)=250V, Min Operating Temperature=-25°C, Connector Type="Male Pin", Contact Material=Brass, Contact Plating=Tin, Contact Type="Male Pin", Depth=5.75mm, Fastening Type=Detent, Housing Material=Polyamide, Lead Free="Lead Free", Lead Pitch=2.5mm, Length=22.4mm, Max Current Rating=3A, Mount="Through Hole", Number of Contacts=8, Number of Positions=8, Number of Rows=1, Orientation=Straight, Packaging=Bulk, Pitch=2.5mm, REACH SVHC="No SVHC", Series=XH, Termination=Press-Fit, Voltage Rating=250V, Voltage Rating (AC)=250V, Wire/Cable Gauge=22AWG
L1 L2: library part CMP-0227-00200-3, "Power Choke Shielded Wirewound 33uH 20% 1KHz Ferrite 3.2A 64mOhm DCR T/R", Ambient Temperature Range High=85°C, Ambient Temperature Range Low=-40°C, Case/Package=Nonstandard, Current Rating=3.6A, DC Resistance (DCR)=44mΩ, Inductance=33µH, Inductance Tolerance=20%, Max DC Current=3.2A, Max Operating Temperature=125°C, Self Resonant Frequency=8.5MHz, Series Resistance=64mΩ, Test Frequency=1kHz, Composition=Wirewound, Core Material=Ferrite, Depth=12mm, Height=8mm, Height - Seated (Max)=8.001mm, Lead Pitch=7mm, Length=12mm, Min Operating Temperature=-40°C, Mount="Surface Mount", Number of Pins=2, REACH SVHC=Unknown, RMS Current (Irms)=3.2A, RoHS=Compliant, Saturation Current=3.6A, Shielding=Shielded, Termination=SMD/SMT, Tolerance=20%, Width=12mm
LS1: library part CMP-08413-000003-1, "AUDIO PIEZO TRANSDUCER 30V TH", Frequency=4kHz, Max Operating Temperature=70°C, Min Operating Temperature=-10°C, Operating Supply Voltage=3V, Package Quantity=350, Diameter=14mm, Height=8mm, Lead Free="Lead Free", Mount="Through Hole", Number of Terminals/Pins=2, Packaging="Tape and Reel", RoHS Compliant=Yes, Self Resonant Frequency=4kHz, Termination="PC Pins", Voltage Rating (DC)=3V, Washable=No
P1 P2: library part CMP-002-00146-1, "Header, 22-Pin", Component Type=Standard, Design Item ID="Header 22", LatestRevisionDate=17-Jul-2002, LatestRevisionNote="Re-released for DXP Platform.", Pins=22, Publisher="Altium Limited", Source="Miscellaneous Connectors.SchLib"
P3: library part CMP-002-00188-1, "Header, 8-Pin", Component Type=Standard, Design Item ID="Header 8", LatestRevisionDate=17-Jul-2002, LatestRevisionNote="Re-released for DXP Platform.", Pins=8, Publisher="Altium Limited", Source="Miscellaneous Connectors.SchLib"
P4 P6 P7: library part CMP-002-00168-1, "Header, 4-Pin", Component Type=Standard, Design Item ID="Header 4", LatestRevisionDate=17-Jul-2002, LatestRevisionNote="Re-released for DXP Platform.", Pins=4, Publisher="Altium Limited", Source="Miscellaneous Connectors.SchLib"
P5: library part CMP-002-00178-1, "Header, 6-Pin", Component Type=Standard, Design Item ID="Header 6", LatestRevisionDate=17-Jul-2002, LatestRevisionNote="Re-released for DXP Platform.", Pins=6, Publisher="Altium Limited", Source="Miscellaneous Connectors.SchLib"
Q1: library part CMP-2000-04944-1, "NPN General-Purpose Amplifier, 40 V VCEO, 0.2 A, -55 to 150 degC, 2-Pin TO-92, RoHS, Bulk", Manufacturer=FairchildSemiconductor, Maximum Collector Base Voltage=60V, Maximum Collector Emitter Saturation Voltage=0.2@1mA@10mA, Maximum Collector Emitter Voltage=40V, Maximum DC Collector Current=0.2A, Maximum Operating Frequency=300(Min)MHz, Maximum Power Dissipation=625mW, Minimum DC Current Gain=40@0.1mA@1V, Operating Temperature=-55to150degC, Package=3TO-92, Package Description="3-Pin Transistor Outline Package, Body Dia 4.79 mm, Pitch 1.27 mm", Package Reference=TO-92, Category=GPBJT, Datasheet URL=https://datasheet.ciiva.com/4722/2n3904-82270-4722369.pdf, Datasheet Version="Rev. 1.1.0, 10/2014", Manufacturer URL=https://www.fairchildsemi.com/, Mounting=ThroughHole, Packaging=Bulk, Pin Count=3, Rad Hard=No, Type=NPN
R1 R3 R5 R7 R9 R13: library part CMP-04015-029161-1, "1kΩ ±1% 0.25W, 1/4W Chip Resistor 1206 (3216 Metric) Moisture Resistant Thin Film"
R2 R4 R6 R8 R14: library part CMP-04015-046600-1, "2kΩ ±1% 0.063W, 1/16W Chip Resistor 0402 (1005 Metric) Moisture Resistant Thin Film"
R10 R11 R12: library part CMP-009-00132-3, "Chip Resistor, 330 Ohms, +/-5 %, 63 mW, -55 to 155 degC, 0402", Case/Package=0402, Max Operating Temperature=155°C, Min Operating Temperature=-55°C, Power=63mW, Tolerance=5%, Pins=2
U1: library part CMP-0069-00270-3, "SIMPLE SWITCHER® Power Converter 150 KHz 3A Step-Down Voltage Regulator, 5-pin TO-263", Manufacturer="Texas Instruments", PackageTopMarking="NSUZXYTTE#*LM2596S*-5.0 P+", PowerWise=N, Code_JEDEC=MO-169-AB, ComponentLink1Description="Datasheet URL", ComponentLink1URL=http://www.ti.com/general/docs/lit/getliterature.tsp?genericPartNumber=LM2596&fileType=pdf, CompType=Switcher, PackageDescription="TO-263, Molded, .400 x .390 x .180in, 5 Lead, .067in Pitch, Surface Mount", PackageReference=KTT0005B, PinCount=5, RoHS=N
U2: library part CMP-0069-00275-3, "SIMPLE SWITCHER® Power Converter 150 KHz 3A Step-Down Voltage Regulator, 5-pin TO-263, Pb-Free", Manufacturer="Texas Instruments", PackageTopMarking="NSUZXYTTE#*LM2596S*-3.3 P+", PowerWise=N, Code_JEDEC=MO-169-AB, ComponentLink1Description="Datasheet URL", ComponentLink1URL=http://www.ti.com/general/docs/lit/getliterature.tsp?genericPartNumber=LM2596&fileType=pdf, CompType=Switcher, PackageDescription="TO-263, Molded, .400 x .390 x .180in, 5 Lead, .067in Pitch, Surface Mount", PackageReference=KTT0005B, PinCount=5, RoHS=Y

## Free pads (board coordinates)
  round 60 hole 30: 11(860,4220) 11(870,4080) 11(970,4220) 11(980,4080) 11(1100,4090) 11(1100,4220) 11(1240,4090) 11(1240,4220) 12(4050,4780) 13(4060,4640) 14(4060,4510) 16(4070,4360) 17(3250,200) 18(4460,1280)

## Via types
v1: diameter 50, hole 28, layer 01 to layer 04, 101 vias

## Nets (pads, with @x,y where several pads share a name; then routed paths per layer and width w, separated by ;. In a path a pad name is that pad's centre, name@x,y a point inside that pad or via, vN(x,y) a via of type N, cw(c..) or ccw(c..) an arc to the next point about the centre after c; other vN are vias at no path point)
3V3_NET: C4.1 J6.1 J7.1 J8.1 L2.2 P3.1 P4.1 P5.2 P6.1 U2.4 | length 10400.3
  layer 01 w10: P3.1 v1(515,2130) ; J6.1 422.52,1695 v1(565,1695) ; U2.4 581.93,3426.93 588.86,3420 v1(720,3420) ; v1(735,2470) 825,2470 P4.1 ; J7.1 1046.18,1865 v1(1200,1865) ; L2.2 v1(1095,3775) ; P6.1 1600,2565 v1(1695,2565) ; v1(1610,1900) 1789.72,1900 J8.1 ; v1(3380,5330) 3505,5330 3531.57,5303.43 C4.1
  layer 02 w10: v1(565,1695) 565,1805 540,1830 520.86,1830 515,1835.86 v1(515,2130) 515,2425 560,2470 v1(735,2470) ; v1(1095,3775) v1@1095,3785 ; v1@1125,2465 1125,2400 1110,2385 755,2385 735,2405 v1(735,2470) ; P5.2 1180,2470 1165,2485 1150.82,2485 1135.82,2470 v1(1125,2470) ; v1(1610,1900) 1575,1865 v1(1200,1865) 1200,1940 1170,1970 1170,2450 1155,2465 1130,2465 v1(1125,2470) ; v1(1695,2565) 1695,2504.12 1695.86,2503.26 1695.86,2460.86 1685,2450 1500.86,2450 1495,2455.86 1495,2500 1475,2520 1130.86,2520 1125,2514.14 v1(1125,2470) ; v1(3380,5330) 3380,5070 3340,5030 3255,5030 3210,4985 3100,4985 3075,4960 3075,4820 3100,4795 3100,4695 3060,4655 3010.86,4655 3005,4649.14 3005,4315 2995,4305 2195,4305 2175,4285 2175,4154.14 2125,4104.14 2125,3950 2085,3910 1095.86,3910 1090,3904.14 1090,3790 v1@1095,3785 ; v1(735,2470) 735,3055 650,3140 650,3389.14 655.86,3395 688.43,3395 713.43,3420 v1(720,3420) 804.14,3420 810,3425.86 810,3750 845,3785 v1@1095,3785
5V_NET: C2.1 C3.1 D2.1 J2.1 J3.1 J4.1 J5.1 L1.2 LS1.1 P1.21 P5.1 P7.1 U1.4 U2.1 | length 19293.7
  layer 01 w10: v1(380,3445) 380,3588.5 U2.1 ; D2.1 925.12,465 v1(1045,465) ; v1(1160,4815) 1206.93,4861.93 U1.4 ; P5.1 1235,2360 v1(1335,2360) ; v1(1455,570) 1703.15,570 LS1.1 ; L1.2 1707.91,3654.88 1760,3706.97 v1(1760,3775) ; P7.1 1995,2570 v1(2095,2570) ; J2.1 2225,5425 v1(2370,5425) ; J3.1 2446.57,4735 v1(2595,4735) ; J5.1 2631.57,5425 v1(2775,5425) ; v1(2865,5120) 2931.57,5120 C2.1 ; J4.1 2880,4745 v1(3040,4745)
  layer 03 w10: v1(1455,570) 1455,495 1425,465 v1(1045,465) 1045,1024.14 1065.86,1045 1150,1045 1175,1070 1175,1750 1285,1860 1285,2275 1330,2320 1330,2355 v1(1335,2360) 1335,2440 1380,2485 2089.14,2485 2095,2490.86 v1(2095,2570) 2104.14,2570 2145,2610.86 2145,3025 2055,3115 2055,3765 2045,3775 v1(1760,3775) 1690,3775 1675,3760 1455,3760 1395,3700 1395,3160 1375,3140 765,3140 745,3160 745,3359.14 739.14,3365 400,3365 380,3385 v1(380,3445) 670,3445 705,3480 705,4380 725,4400 970,4400 1000,4430 1000,4556.85 C3.1 1005,4561.85 1005,4605 1015,4615 1100,4615 1115,4630 1115,4770 v1(1160,4815) 1200,4775 1515,4775 1560,4730 2441.57,4730 J3.1 ; v1(2370,5425) 2400,5455 2745,5455 v1(2775,5425) ; v1(2595,4735) 2600,4740 2600,4784.14 2605.86,4790 2995,4790 v1(3040,4745) 3040,4855 3015,4880 2785,4880 2775,4890 v1(2775,5425) ; v1(2865,5120) 2870,5125 2870,5415 2860,5425 v1(2775,5425)
  esp32 w10: v1(2370,5425) 2370,5510 2380,5520 2864.14,5520 2867.07,5517.07 2870,5514.14 2870,4687.81 2867.07,4684.88 2865.18,4682.99 ccw(c2875,4641.57) 2860.09,4601.71 cw(c2856.55,4592.36) 2860.09,4583.01 ccw(c2875,4543.15) 2860.09,4503.29 cw(c2856.55,4493.94) 2860.09,4484.59 ccw(c2875,4444.72) 2865.18,4403.31 2867.07,4401.42 ; P1.21 2450.63,3370.63 2444.14,3364.14 2444.14,3355.86 2450,3350 2450,2825.86 2455.86,2820 2597.34,2820 2607.34,2810 2800,2810 2870,2880 2870,4398.49 2867.09,4401.4
12V_NET: C1.1 J1.1 U1.1 | length 1436.5
  layer 01 w50: C1.1 420.79,4540.79 420.79,5269.21 J1.1 517.32,5270 546.61,5240.71 546.61,5239.6 803.7,4982.52 U1.1
BUZZ_CNTRL: P2.20 R9.1 | length 7102.5
  layer 01 w10: R9.1 380,791.02 v1(380,950) ; v1(3410,3260) 3415.31,3265.31 3536.42,3265.31 P2.20
  esp32 w10: v1(380,950) 3360,950 3610,1200 3794.14,1200 3800,1205.86 3800,3570 3710,3660 3370,3660 3340,3630 3340,3330 v1(3410,3260)
ECHO_1: J2.3 R1.1 | length 1020.1
  layer 01 w10: R1.1 1550,5480 1550,5524.14 1552.93,5527.07 1555.86,5530 2124.14,5530 2127.07,5527.07 2130,5524.14 2130,5230 2140,5220 2213.15,5220 J2.3
ECHO_2: J3.3 R5.1 | length 1476.3
  layer 01 w10: v1(1500,5050) R5.1
  layer 04 w10: v1(1500,5050) 1500,4995 1515,4980 2225,4980 2250,4955 2250,4675 2295,4630 2379.14,4630 2385,4624.14 2385,4550 2395,4540 2441.57,4540 J3.3
ECHO_3: J4.3 R3.1 | length 2101.1
  layer 01 w10: v1(1505,5250) 1563.98,5250 R3.1
  layer 04 w10: v1(1505,5250) 1505,5160 1520,5145 1867.67,5145 1884.96,5162.28 2382.72,5162.28 2395,5150 2395,4880 2405,4870 2630,4870 2700,4800 2700,4549.01 2705.86,4543.15 J4.3
ECHO_4: J5.3 R7.1 | length 1654.6
  layer 01 w10: R7.1 1578.98,4791.02 1595,4775 2200,4775 2220,4795 2220,4950 2245,4975 2684.14,4975 2690,4980.86 2690,5205 2683.43,5211.57 J5.3
GND_NET: C1.2 C2.2 C3.2 C4.2 D1.2 D3.2 D4.2 DS1.2 DS3.2 J1.2 J2.4 J3.4 J4.4 J5.4 J6.2 J7.2 J8.2 P1.22 P2.1 P2.21 P2.22 P3.2 P4.4 P5.3 P6.2 P7.2 pad.11@860,4220 pad.11@870,4080 pad.11@970,4220 pad.11@980,4080 pad.11@1100,4090 pad.11@1100,4220 pad.11@1240,4220 pad.12 pad.13 pad.14 pad.16 Q1.1 R2.2 R4.2 R6.2 R8.2 R14.1 U1.3 U1.5 U1.6 U2.3 U2.5 U2.6 | length 27110.9
  layer 01 w10: v1(350,240) 350,400 Q1.1 350,410 260,410 245,425 245,1529.14 250.86,1535 357.24,1535 J6.2 ; J1.2 1020,5270 U1.6 ; U2.5 650,3590.79 650,3694.14 644.14,3700 520.86,3700 515,3694.14 U2.3 515,3405.86 ; U1.3 U1.6 ; J8.2 1721.85,1801.85 1686.06,1766.06 J7.2 1041.73,1770 970,1770 955,1755 955,1615 938.43,1598.43 J6.2 ; R2.2@1850,5475 1850,5380 1825,5355 1455,5355 1420,5390 1380,5390 ; R4.2 1860,5195 1845,5180 1460.86,5180 1455,5185.86 1455,5294.14 1449.14,5300 1405,5300 ; R8.2 1880,4939.14 1874.14,4945 1425,4945 1405,4965 1405,5140 ; P7.2 1905,2680 1885,2660 P6.2 1500.86,2660 1495,2654.14 1495,2585 1480,2570 P5.3 1155,2570 1135,2590 1135,2745 1100,2780 P4.4 P4.4@815,2780 ; P1.22 P2.22 ; P2.1 3562.36,1350 3644.14,1350 3740,1445.86 3740,3270 3639.37,3370.63 P2.21 P2.22 ; R14.1 3753.46,4778.46 3765,4790 3765,5208.43 C4.2 ; v1(3890,2910) 3890,3260 3679.69,3470.31 3542.05,3470.31 P2.22 ; D4.2 4065,5230 4050,5245 C4.2 ; DS3.2 4056.58,5371.58 4056.58,5337.44 4054.14,5335 3818.43,5335 C4.2 ; J6.2 414.09,1605 325,1605 305.28,1624.72 305.28,1962.47 345,2002.19 345,2220 355,2230 P3.2 495,2310 495,2760 515,2780 P4.4@815,2780 ; 515,3405.86 515,3350 525,3340 704.14,3340 710,3334.14 710,3150 800,3060 800,2819.69 821.32,2798.37 821.32,2786.32 P4.4@815,2780 ; 515,3405.86 509.14,3400 350,3400 320,3430 320,3656.77 395.57,3732.35 395.57,3885.57 U2.6 515,4525 530,4540 C1.2 618.43,4491.57 640,4470 1161.28,4470 1200,4508.72 C3.2 ; U1.6 1380,5390 ; U1.6 1258.46,5271.54 1258.46,5156.54 1273.86,5141.14 U1.5 1270,4978.66 1270,4826.36 1200,4756.36 C3.2 ; C3.2 1595,4560 1635.55,4600.55 D3.2 D1.2 2334.45,4600.55 2350,4585 2350,4455 2365,4440 2443.15,4440 J3.4 2448.29,4441.44 2871.71,4441.44 J4.4 3365.28,4444.72 3380,4430 DS1.2 3475,4480 3724.14,4480 3730,4474.14 3730,4190 3710,4170 3390,4170 3390,3622.36 P2.22 ; 1380,5390 1405,5365 1405,5300 ; 1405,5140 1405,5300 ; 1405,5140 1430,5115 1845,5115 1865,5095 R6.2 2205,5055 2215,5065 J2.4 2218.29,5116.44 2611.71,5116.44 J5.4 2615,5154.14 2609.14,5160 2535.86,5160 2530,5165.86 2530,5220 2565,5255 2990.24,5255 3020.24,5285 3205,5285 3216.62,5273.38 3216.62,5221.81 C2.2 3231.81,5206.62 3231.81,5183.19 3264.49,5150.51 3715.51,5150.51 3725,5160 3725,5241.57 C4.2
GPS_RX: P2.3 P6.4 | length 4903.2
  layer 01 w10: P6.4 v1(1790,2860) ; P2.3 3542.05,1570.32 3689.69,1570.32 v1(3690,1570)
  esp32 w10: v1(1790,2860) 1790,2305.86 1805.86,2290 2120,2290 2140,2270 v1(2140,2190)
  layer 04 w10: v1(2140,2190) 2140,880 2150,870 3684.14,870 3690,875.86 v1(3690,1570)
GPS_TX: P2.2 P6.3 | length 3835.1
  layer 01 w10: P6.3 v1(1730,2760) ; v1(3430,1450) 3478.15,1450 3497.2,1469.05 3540.15,1469.05 P2.2
  esp32 w10: v1(1730,2760) 1725.86,2764.14 1725.86,3044.14 1731.72,3050 2244.14,3050 2250,3044.14 v1(2250,2530) ; v1(3110,2390) 3110,1480 v1(3130,1460)
  layer 04 w10: v1(2250,2530) 2420.25,2530 2424.15,2526.1 3114.14,2526.1 3120,2520.24 3120,2400 v1(3110,2390) ; v1(3130,1460) 3135,1455 3425,1455 v1(3430,1450)
I2C_SCL: P1.8 P3.3 | length 2768.3
  layer 01 w10: v1(270,2310) 335.1,2310 355.1,2330 P3.3
  layer 02 w10: v1(1360,2000) 1530,2000 1600.63,2070.63 P1.8
  layer 04 w10: v1(270,2310) 270,2020 290,2000 v1(1360,2000)
I2C_SDA: P1.7 P3.4 | length 4728.6
  layer 01 w10: v1(280,2430) P3.4
  esp32 w10: v1(280,2430) v1@270,2430 ; v1@280,2440 v1@270,2430 ; P1.7 2716.49,1970.63 2722.35,1976.49 2722.35,2618.42 2716.49,2624.28 2340.86,2624.28 2335,2630.14 2335,3085 1526.38,3085 1506.38,3065 165.86,3065 160,3059.14 160,2450 180,2430 v1@270,2430
JOY_SW: J6.5 P2.16 | length 5099.3
  layer 01 w10: J6.5 556.85,1303.15 v1(590,1270) ; v1(3420,2850) 3473.15,2850 3493.78,2870.63 P2.16
  esp32 w10: v1(590,1270) 590,1060 650,1000 3200,1000 3290,1090 3290,2530 v1(3380,2620)
  layer 04 w10: v1(3380,2620) 3420,2660 v1(3420,2850)
JOY_X: J6.3 P1.4 | length 3514.7
  layer 01 w10: J6.3 v1(590,1500) ; P1.4 2679.81,1670.63 2710,1700.82 v1(2710,1804.14)
  esp32 w10: v1(590,1500) 590,1550 690,1650 690,2160 700,2170 1984.14,2170 1990,2164.14 1990,1822.93 1995.86,1817.07 2697.07,1817.07 v1(2710,1804.14)
JOY_Y: J6.4 P1.5 | length 3157.4
  layer 01 w10: J6.4 426.46,1395.79 584.21,1395.79 v1(590,1390) ; v1(2450,1770) 2450.32,1770.32 2557.17,1770.32 P1.5
  esp32 w10: v1(590,1390) 750,1390 760,1400 760,2094.14 765.86,2100 1944.14,2100 1950,2094.14 1950,1790 1970,1770 v1(2450,1770)
LED_JOYSTICK: P2.19 R12.1 | length 3804.6
  layer 01 w10: v1(3420,3160) 3425.31,3165.31 3536.42,3165.31 P2.19 ; R12.1 3600,4290 v1(3630,4260)
  esp32 w10: P2.19 3542.36,3170 3704.14,3170 3710,3164.14 3710,2732.2 3703.9,2726.1 3163.9,2726.1 3040,2850 2935.86,2850 2930,2855.86 2930,4034.14 2935.86,4040 3624.14,4040 3630,4045.86 v1(3630,4260)
LED_OVERRIDE: P2.17 R10.1 | length 4184.7
  layer 01 w10: v1(3420,2960) 3425.31,2965.31 3536.42,2965.31 P2.17 ; R10.1 4220.98,5374.57 4270,5325.55 4304.45,5325.55 v1(4310,5320)
  esp32 w10: v1(3420,2960) 3050,2960 3010,3000 3010,3924.14 3015.86,3930 4144.14,3930 4150,3935.86 4150,5160 v1(4310,5320)
LED_VOICE: P2.18 R11.1 | length 3660.6
  layer 01 w10: v1(3420,3060) 3425.31,3065.31 3536.42,3065.31 P2.18 ; R11.1 4225.98,5087.28 4273.27,5040 4273.27,5006.73 v1(4280,5000)
  esp32 w10: v1(3420,3060) 3110,3060 3070,3100 3070,3810 3100,3840 4220,3840 4280,3900 v1(4280,5000)
LPWM_L: J8.6 P2.11 | length 3240.5
  layer 01 w10: J8.6 1790.93,1409.07 1939.07,1409.07 v1(1940,1410) ; v1(2920,2200) 3160,2200 3330.63,2370.63 P2.11
  esp32 w10: v1(1940,1410) 1940,1100 1950,1090 2852.14,1090 2858,1095.86 2858,2194.14 2863.86,2200 v1(2920,2200)
LPWM_R: J7.6 P2.9 | length 3860.9
  layer 01 w10: J7.6 1049.49,1376.18 1236.18,1376.18 v1(1240,1380) ; v1(2940,1860) 3280,1860 3360,1940 3360,2094.14 3365.86,2100 3445.38,2179.52 3532.84,2179.52 P2.9
  layer 02 w10: v1(1240,1380) 1240,1060 1250,1050 2930,1050 v1@2940,1060
  esp32 w10: v1(2935,1055) 2937.5,1057.5 2937.5,1857.5 v1(2940,1860)
MOTOR_EN: J7.3 J7.4 J8.3 J8.4 P2.13 | length 3641.1
  layer 01 w10: J7.3 J7.4 1754.21,1569.21 J8.4 J8.3
  layer 02 w10: v1(2786.1,1626.1) 2790,1622.2 2790,1620 2796.1,1626.1 3396.1,1626.1 3444.14,1674.14 3444.14,2534.14 3480.63,2570.63 P2.13
  esp32 w10: J8.3 2406.57,1703.43 2483.9,1626.1 v1(2786.1,1626.1)
MPU_INT: P1.6 P3.8 | length 3182.1
  layer 01 w10: P3.8 450,2865 450,2890 455.86,2895.86 564.14,2895.86 v1(570,2890) ; v1(2440,1880) 2444.68,1875.32 2552.8,1875.32 P1.6
  esp32 w10: v1(570,2890) 570,2235.86 575.86,2230 2040,2230 2060,2210 2060,1885.86 2065.86,1880 v1(2440,1880)
NetD1_1: D1.1 L1.1 U1.2 | length 3697.1
  layer 01 w10: U1.2 1075,4980.59 v1(1075,4860) ; v1(1705,3125) L1.1 ; v1(1865,3840) 1865,4035 1899.45,4069.45 D1.1
  layer 02 w10: v1(1075,4860) 1330,4860 1370,4820 1370,4030 1435,3965 2025,3965 2045,3985 2045,4064.45 D1.1 ; v1(1705,3125) 2009.14,3125 2015,3130.86 2015,3805 1980,3840 v1(1865,3840)
NetD2_2: D2.2 LS1.2 Q1.3 | length 2072.4
  layer 01 w10: Q1.3 830,405 835.86,410.86 835.86,419.14 835,420 835,745 855.12,765.12 D2.2 965.12,725 994.14,725 1000,719.14 1000,520.86 1005.86,515 1899.14,515 1905,520.86 LS1.2
NetD3_1: D3.1 L2.1 U2.2 | length 3090.6
  layer 01 w10: U2.2 U2.2@448.07,3644.33 ; L2.1 1095,3180.86 1089.14,3175 795,3175 780,3190 780,3725 765,3740 485.19,3740 479.33,3734.14 479.33,3665.86 473.47,3660 463.74,3660 U2.2@448.07,3644.33 ; D3.1 1700,4059.45 1700,3815 1670,3785 1375.82,3785 1335.82,3825 827.46,3825 787.46,3785 493.28,3785 448.07,3739.79 U2.2@448.07,3644.33
NetD4_1: D4.1 R11.2 | length 429.8
  layer 01 w10: D4.1 3965.01,5019.99 3985.86,4999.14 3994.14,4999.14 3995,5000 4160,5000 4180,5020 4180,5119.14 4185.86,5125 4222.72,5125 R11.2
NetDS1_1: DS1.1 R12.2 | length 459.7
  layer 01 w10: DS1.1 3280,4335.86 3285.86,4330 3554.14,4330 3560,4335.86 3560,4419.14 3565.86,4425 R12.2
NetDS3_1: DS3.1 R10.2 | length 302.8
  layer 01 w10: DS3.1 3965,5419.14 3970.86,5425 4087.44,5425 4102.44,5410 R10.2
NetP1_14: P1.14 P5.6 | length 7905.1
  layer 01 w10: P5.6 1329.18,2870 1349.18,2890 v1(1360,2890)
  layer 02 w10: P1.14 3385.94,2670.63 3430.47,2626.1 3816.1,2626.1 v1(3855,2665)
  layer 04 w10: v1(1360,2890) 1430,2890 1440,2880 1440,795.86 1445.86,790 3790,790 3850,850 3850,2660 v1@3860,2670
NetP1_15: P1.15 P5.5 | length 2165.8
  layer 01 w10: P5.5 1329.18,2770 1349.18,2790 v1(1360,2790)
  layer 02 w10: v1(1490,2360) 1490,2349.18 1502.43,2336.75 1502.43,2335.86 1508.28,2330 2310,2330 2380,2400 2380,2774.14 2385.86,2780 2548.11,2780 P1.15
  esp32 w10: v1(1360,2790) 1360,2736.3 1330,2706.3 1330,2490 1460,2360 v1(1490,2360)
NetP1_16: P1.16 P5.4 | length 2470.7
  layer 01 w10: P5.4 1230,2675 1365,2675 v1(1370,2680)
  layer 02 w10: v1(1020,2980) 1020,3020 1030,3030 1410,3030 1420.86,3019.14 1420.86,3015.86 1426.72,3010 2410,3010 2420,3000 2420,2880 2429.37,2870.63 P1.16
  layer 04 w10: v1(1020,2980) 1020,2830 1030,2820 1273.43,2820 1360,2733.43 1360,2700.82 1380,2680.82 1380,2680 v1(1370,2680)
NetP2_4: P2.4 R1.2 R2.1 | length 6957.2
  layer 01 w10: R1.2 1812.03,5475 1818.3,5481.27 1818.3,5489.07 1830.49,5501.27 1866.05,5501.27 1897.32,5470 v1(1970,5470)
  layer 02 w10: P2.4 3546.42,1675.32 3995.31,1675.32 v1(4000,1680)
  esp32-1 w10: v1(1970,5470) 1970,5371.3 1930,5331.3 1930,5249.29 1935.86,5243.43 2081.67,5243.43 2198.24,5360 2940,5360 2945.86,5365.86 2954.14,5365.86 2960,5360 2960,4970 2990,4940 3134.14,4940 3140,4934.14 3140,4310 3020,4190 3020,4110 3130,4000 3650,4000 3680,4030 v1(4002.93,4030)
  layer 04 w10: v1(4000,1680) 4001.46,1681.46 4001.46,4028.54 v1(4002.93,4030)
NetP2_5: P2.5 R3.2 R4.1 | length 7155.5
  layer 01 w10: R3.2 1823.76,5255 1830.02,5261.27 1830.02,5269.07 1842.22,5281.27 1877.78,5281.27 1886.57,5272.48 1917.4,5272.48 1948.45,5303.54 v1(2013.54,5303.54)
  layer 02 w10: P2.5 3542.05,1770.32 4129.69,1770.32 v1(4130,1770)
  esp32-1 w10: v1(2013.54,5303.54) 2260,5550 3620,5550 3630,5540 3630,4990 3635.86,4984.14 3684.14,4984.14 3690,4978.28 3690,4125.86 3695.86,4120 4220,4120 4320,4020 v1(4320,3690)
  esp32 w10: v1(4130,1770) 4140,1760 4140,1780 4320,1960 v1(4320,3690)
NetP2_6: P2.6 R5.2 R6.1 | length 8074.1
  layer 01 w10: R5.2 1706.02,5055 1828.76,5055 1838.43,5045.32 1838.43,5037.52 1847.22,5028.73 1983.69,5028.73 v1(2020,4930)
  layer 02 w10: P2.6 4040.63,1870.63 v1(4120,1950)
  esp32-1 w10: v1(2020,4930) 1978.24,4888.24 1484.1,4888.24 1450,4854.14 1450,4700 1510,4640 1510,3880 1504.14,3874.14 1495.86,3874.14 1490,3880 1280,3880 1260,3860 1260,3435.86 1265.86,3430 2010,3430 2193.79,3613.79 2202.07,3613.79 2205.86,3610 v1(4240,3610)
  esp32 w10: v1(4120,1950) 4240,2070 v1(4240,3610)
NetP2_7: P2.7 R7.2 R8.1 | length 6202.3
  layer 01 w10: R7.2 R8.1 1843.76,4850 1850.02,4843.73 1850.02,4835.93 1862.22,4823.73 1894.92,4823.73 1977.05,4850 v1(2100,4850)
  layer 02 w10: P2.7 4020.63,1970.63 v1(4120,2070)
  esp32-1 w10: v1(2100,4850) 2100,4710 2080,4690 1900,4690 1860,4650 1860,4240 1890,4210 2580,4210 2680,4110 2680,3740 2690,3730 v1(3280,3730)
  esp32 w10: v1(3280,3730) 3283.45,3733.45 4114.14,3733.45 4120,3727.59 v1(4120,2070)
NetP2_12: P2.12 P4.2 | length 3532.6
  layer 01 w10: P4.2 885,2530 v1(960,2530)
  esp32 w10: v1(960,2530) 960,2285.86 965.86,2280 v1(1620,2280)
  layer 04 w10: v1(1620,2280) 1620,2370 1630,2380 2370,2380 2430,2320 2571.08,2320 2660,2231.08 2660,2145.86 2665.86,2140 3330,2140 3350,2160 3350,2464.14 3355.86,2470 3541.1,2470 P2.12
NetP7_3: P7.3 R13.2 R14.2 | length 3625.9
  layer 01 w10: P7.3 v1(2090,2780) ; v1(3305,4705) 3355,4755 3355,4798.98 R13.2 3480,4800 3495,4815 R14.2
  layer 04 w10: v1(2090,2780) 2090,3020 2050,3060 1985.86,3060 1980,3065.86 1980,3835 2000,3855 2120,3855 2150,3885 2150,4060 2200,4110 2200,4235 2225,4260 3030,4260 3050,4280 3050,4605 3150,4705 v1(3305,4705)
NetQ1_2: Q1.2 R9.2 | length 455.9
  layer 01 w10: Q1.2 405,685 425,705 490.16,705 496.02,710.86 R9.2
RPWM_L: J8.5 P2.10 | length 2894.2
  layer 01 w10: J8.5 1915.75,1506.57 1929.18,1520 v1(1940,1520) ; v1(3030,2010) 3274.14,2010 3320,2055.86 3320,2264.14 3326.49,2270.63 P2.10
  esp32 w10: v1(1940,1520) 2074.14,1520 2080,1514.14 2080,1275.86 2085.86,1270 v1(2750,1270)
  layer 04 w10: v1(2750,1270) 2900,1270 3000,1370 3000,1980 v1(3030,2010)
RPWM_R: J7.5 P2.8 | length 3737.2
  layer 01 w10: J7.5 1050.28,1475.39 1235.39,1475.39 v1(1240,1480) ; v1(3050,1730) 3324.14,1730 3410,1815.86 3410,2038.9 3441.73,2070.63 P2.8
  layer 02 w10: v1(1240,1480) 1240,1500 1260,1480 1354.14,1480 1360,1474.14 1360,1145.86 1365.86,1140 v1(3060,1140)
  esp32 w10: v1(3050,1730) 3055,1725 3055,1145 v1(3060,1140)
US_TRIG_1: J2.2 P1.20 | length 2671.6
  layer 01 w10: J2.2 2361.73,5316.57 ccw(c2361.73,5328.27) v1(2370,5320)
  esp32 w10: v1(2310,3270) 2310,4210 2190,4330 2190,4900 2200,4910 2360,4910 2370,4920 v1(2370,5320)
  layer 04 w10: v1(2310,3270) 2310.31,3270.31 2557.17,3270.31 P1.20
US_TRIG_2: J3.2 P1.17 | length 2133.4
  layer 01 w10: J3.2 2447.5,4632.5 2587.5,4632.5 v1(2590,4630)
  esp32 w10: P1.17 2558.11,2970 2794.14,2970 2800,2975.86 2800,4150 2600,4350 2600,4609.18 2590,4619.18 v1(2590,4630)
US_TRIG_3: J4.2 P1.19 | length 1965.6
  layer 01 w10: v1(2560,4530) 2600,4530 2711.57,4641.57 J4.2
  esp32 w10: P1.19 2702.52,3170.63 2751.89,3220 2751.89,4108.11 2560,4300 v1(2560,4530)
US_TRIG_4: J5.2 P1.18 | length 2620.4
  layer 01 w10: v1(2440,5230) 2440,5320 2445.86,5325.86 2531.4,5325.86 2547.25,5310 J5.2
  esp32 w10: v1(2380,3180) 2375.86,3180 2370,3185.86 2370,4734.76 2440,4804.76 v1(2440,5230)
  layer 04 w10: v1(2380,3180) 2420,3140 2420,3075.86 2425.86,3070 2556.85,3070 P1.18
VOICE_RX: P1.11 P7.4 | length 1429.2
  layer 01 w10: v1(1880,2920) 1945,2920 P7.4
  esp32 w10: v1(1880,2920) 1880,2984.14 1885.86,2990 2160,2990 2180,2970 2180,2445.86 2185.86,2440 2450,2440 2512.95,2377.05 2551.06,2377.05 P1.11
VOICE_TX: P1.10 R13.1 | length 4016.9
  layer 01 w10: P1.10 2557.8,2270.31 2682.03,2270.31 v1(2682.35,2270) ; R13.1 3233.98,4956.02 3257.95,4980 v1(3430,4980)
  esp32 w10: v1(3190,4110) 3494.14,4110 3500,4115.86 3500,4540 3430,4610 v1(3430,4980)
  layer 04 w10: v1(2682.35,2270) 3150,2270 3190,2310 v1(3190,4110)
pads on no net: J6. J7.7 J7.8 J8.7 J8.8 P1.1 P1.2 P1.3 P1.9 P1.12 P1.13 P2.14 P2.15 P3.5 P3.6 P3.7 P4.3
copper on no net: | length 19898.3
  layer 02 w10: -1.57,-5.75 -1.57,5702.91 4574.41,5702.91 cw(c4574.41,5652.91) 4624.41,5652.91 4624.41,1273.78 3344.88,-5.75 -1.57,-5.75

## Polygon pours and split planes (outlines as drawn)
GND_NET on GND "GND_NET_L02_P000" (solid, pour order 0): 0,5710 4540,5710 4590,5660 4600,5670 4620,5670 4620,1280 3330,-10 30,-10 -10,30
GND_NET on GND-1 "GND_NET_L07_P001" (solid, pour order 1): 10,5700 20,5710 4600,5710 4600,5670 4630,5640 4620,5630 4620,1290 3350,20 3350,10 0,10 -10,0

## Silkscreen, mask and mechanical layers (free items; w line width, h text height)
Top Overlay:
  text "Main Board" at 2200.12,170.03 h80

## Dimensions
2557.48,1370.63 to 3541.73,1370.63 on Top Overlay

## Text inside footprints (layer, text, board x,y; h text height)
C1: Top Overlay "+" at 262.14,4510.47 h59.06
C2: Top Overlay "+" at 2867.14,5185.47 h59.06
C3: Top Overlay "+" at 843.71,4530.47 h59.06
C4: Top Overlay "+" at 3372.14,5215.47 h59.06
D4: Top Overlay "+" at 3855.55,5057.01 h31.5